# Altium PCB PCB1.PcbDoc (part 1 of 3)
Units mil, origin at the board's own origin, x right, y up, seen from the top; angles counter-clockwise.
Board outline 3937.01 x 3937.01 mil, 4 copper layers (L1, L2, L3, L4), stack 61.851 mil thick; 165 components, 197 nets, 827 pads, 400 vias.
Unrouted connection lines stored in the file: 1.
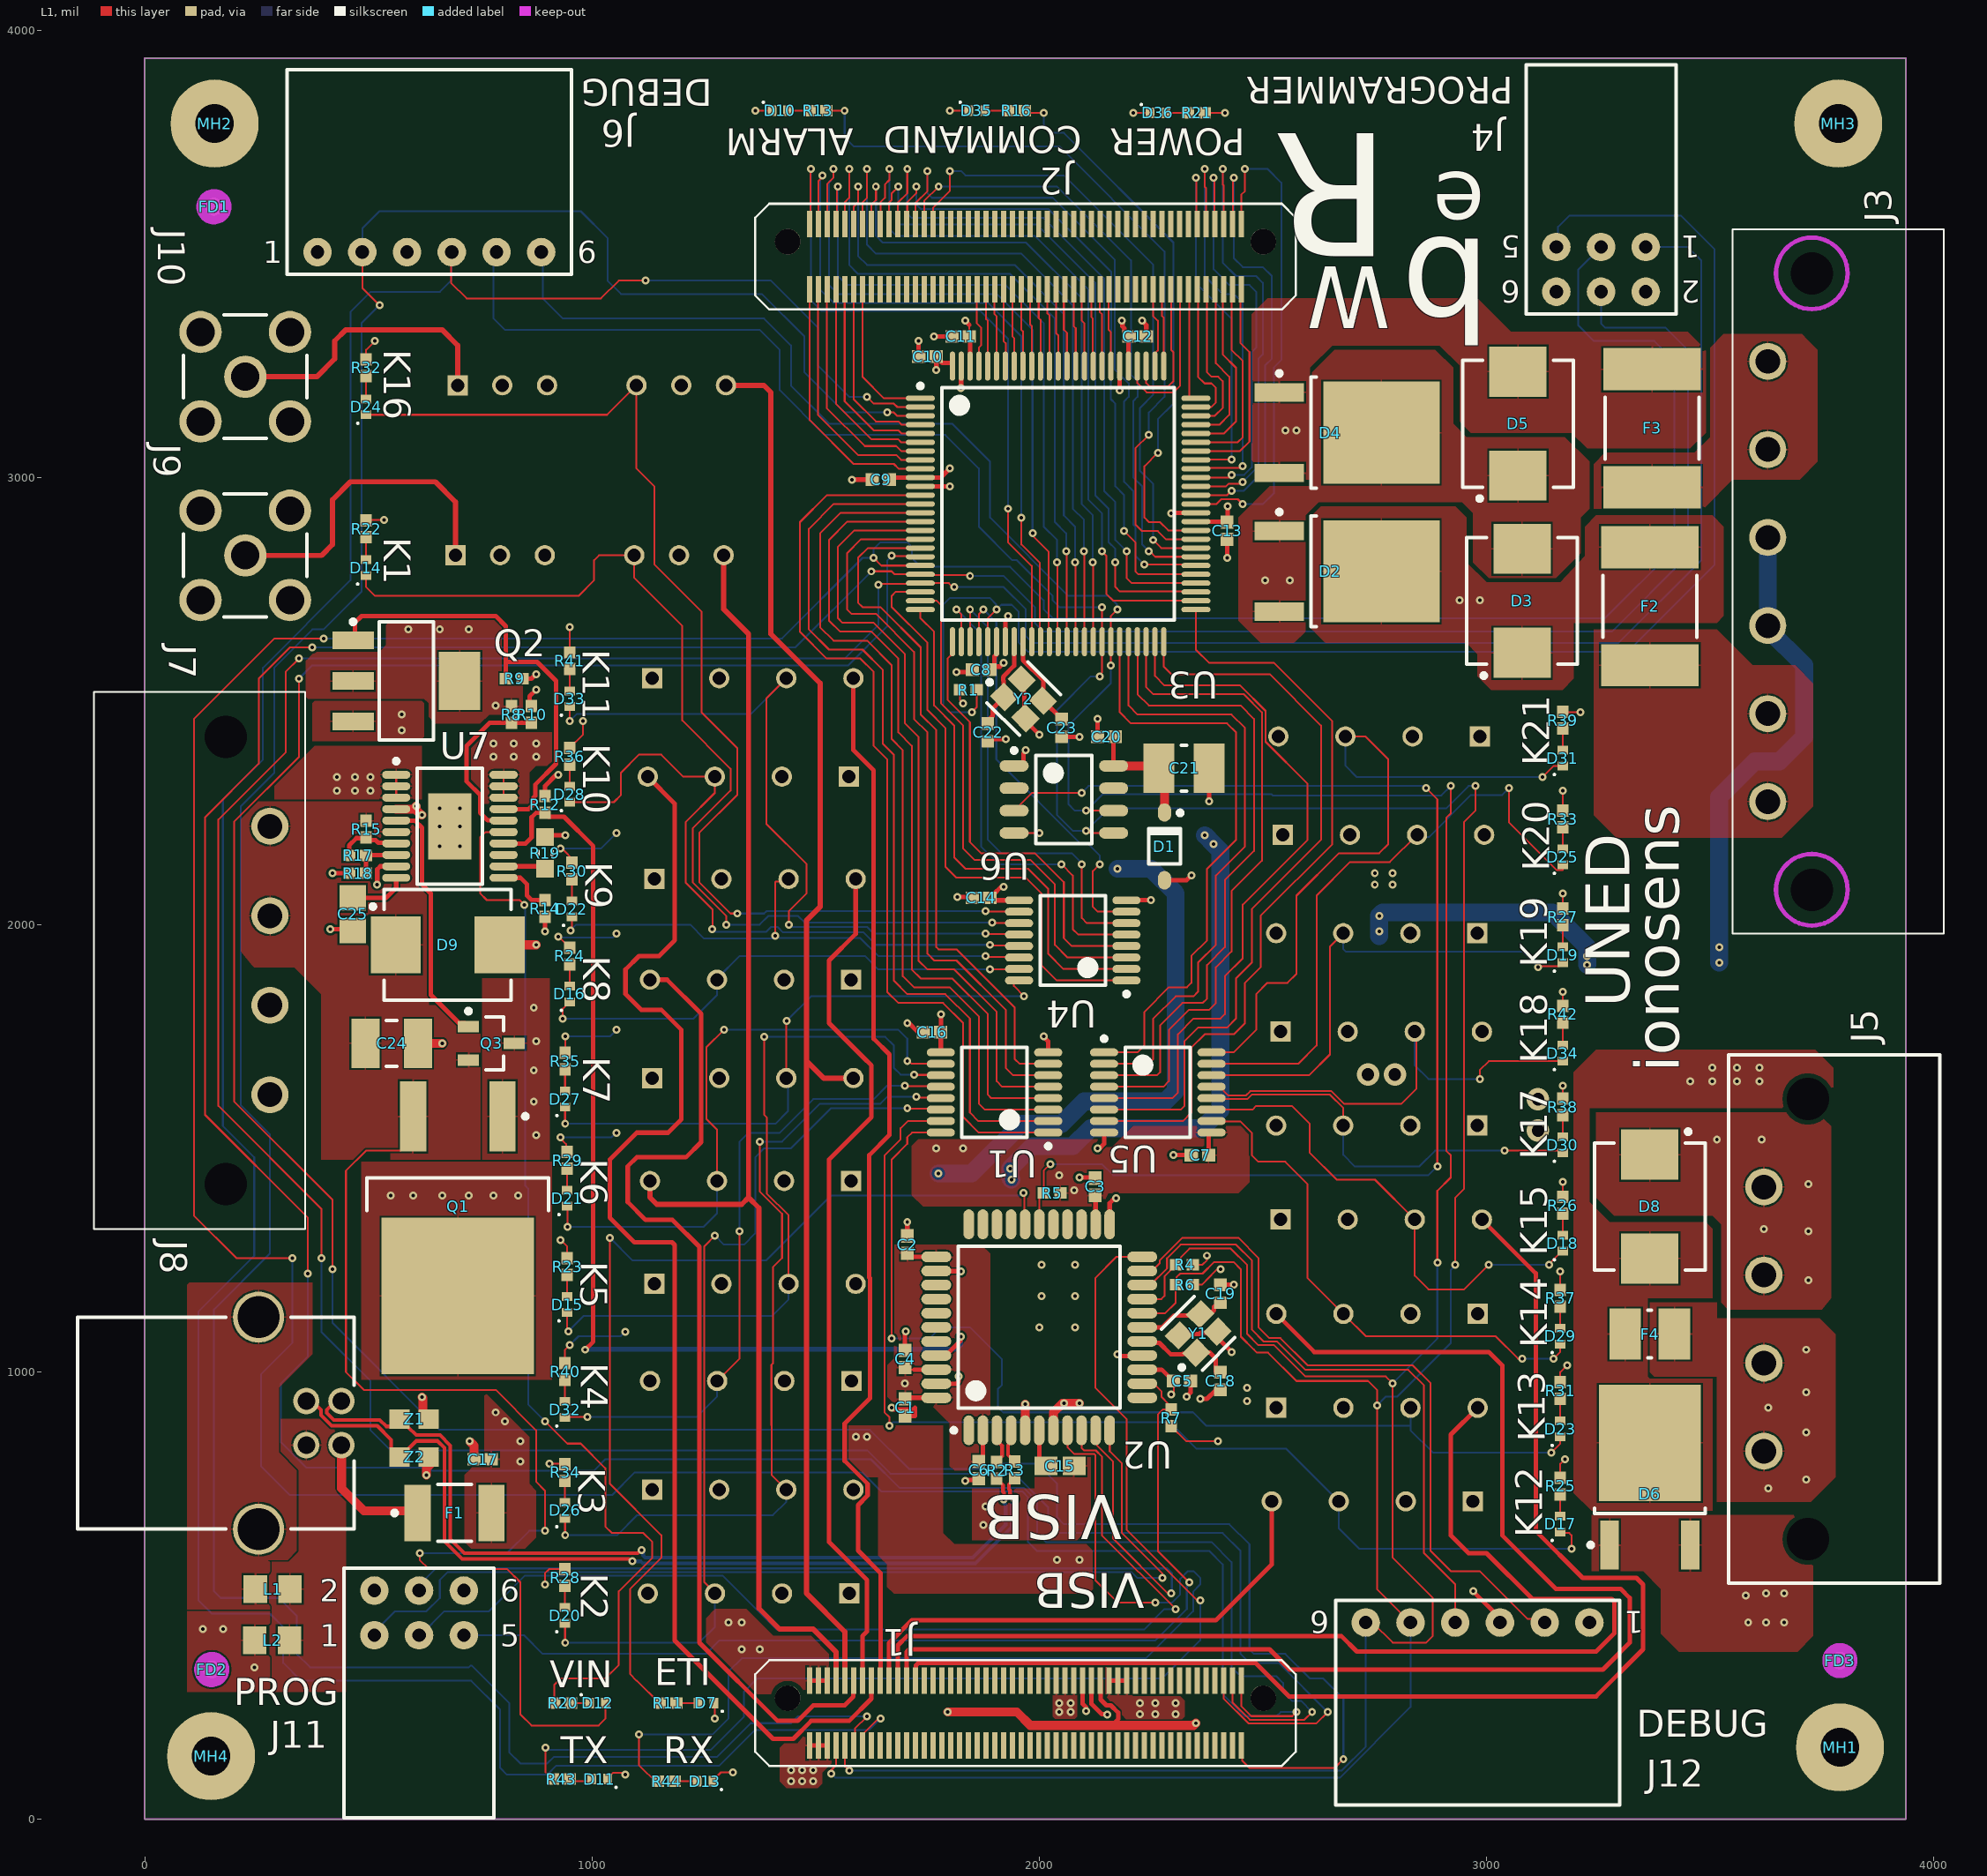
[diagram p0: L1 view]
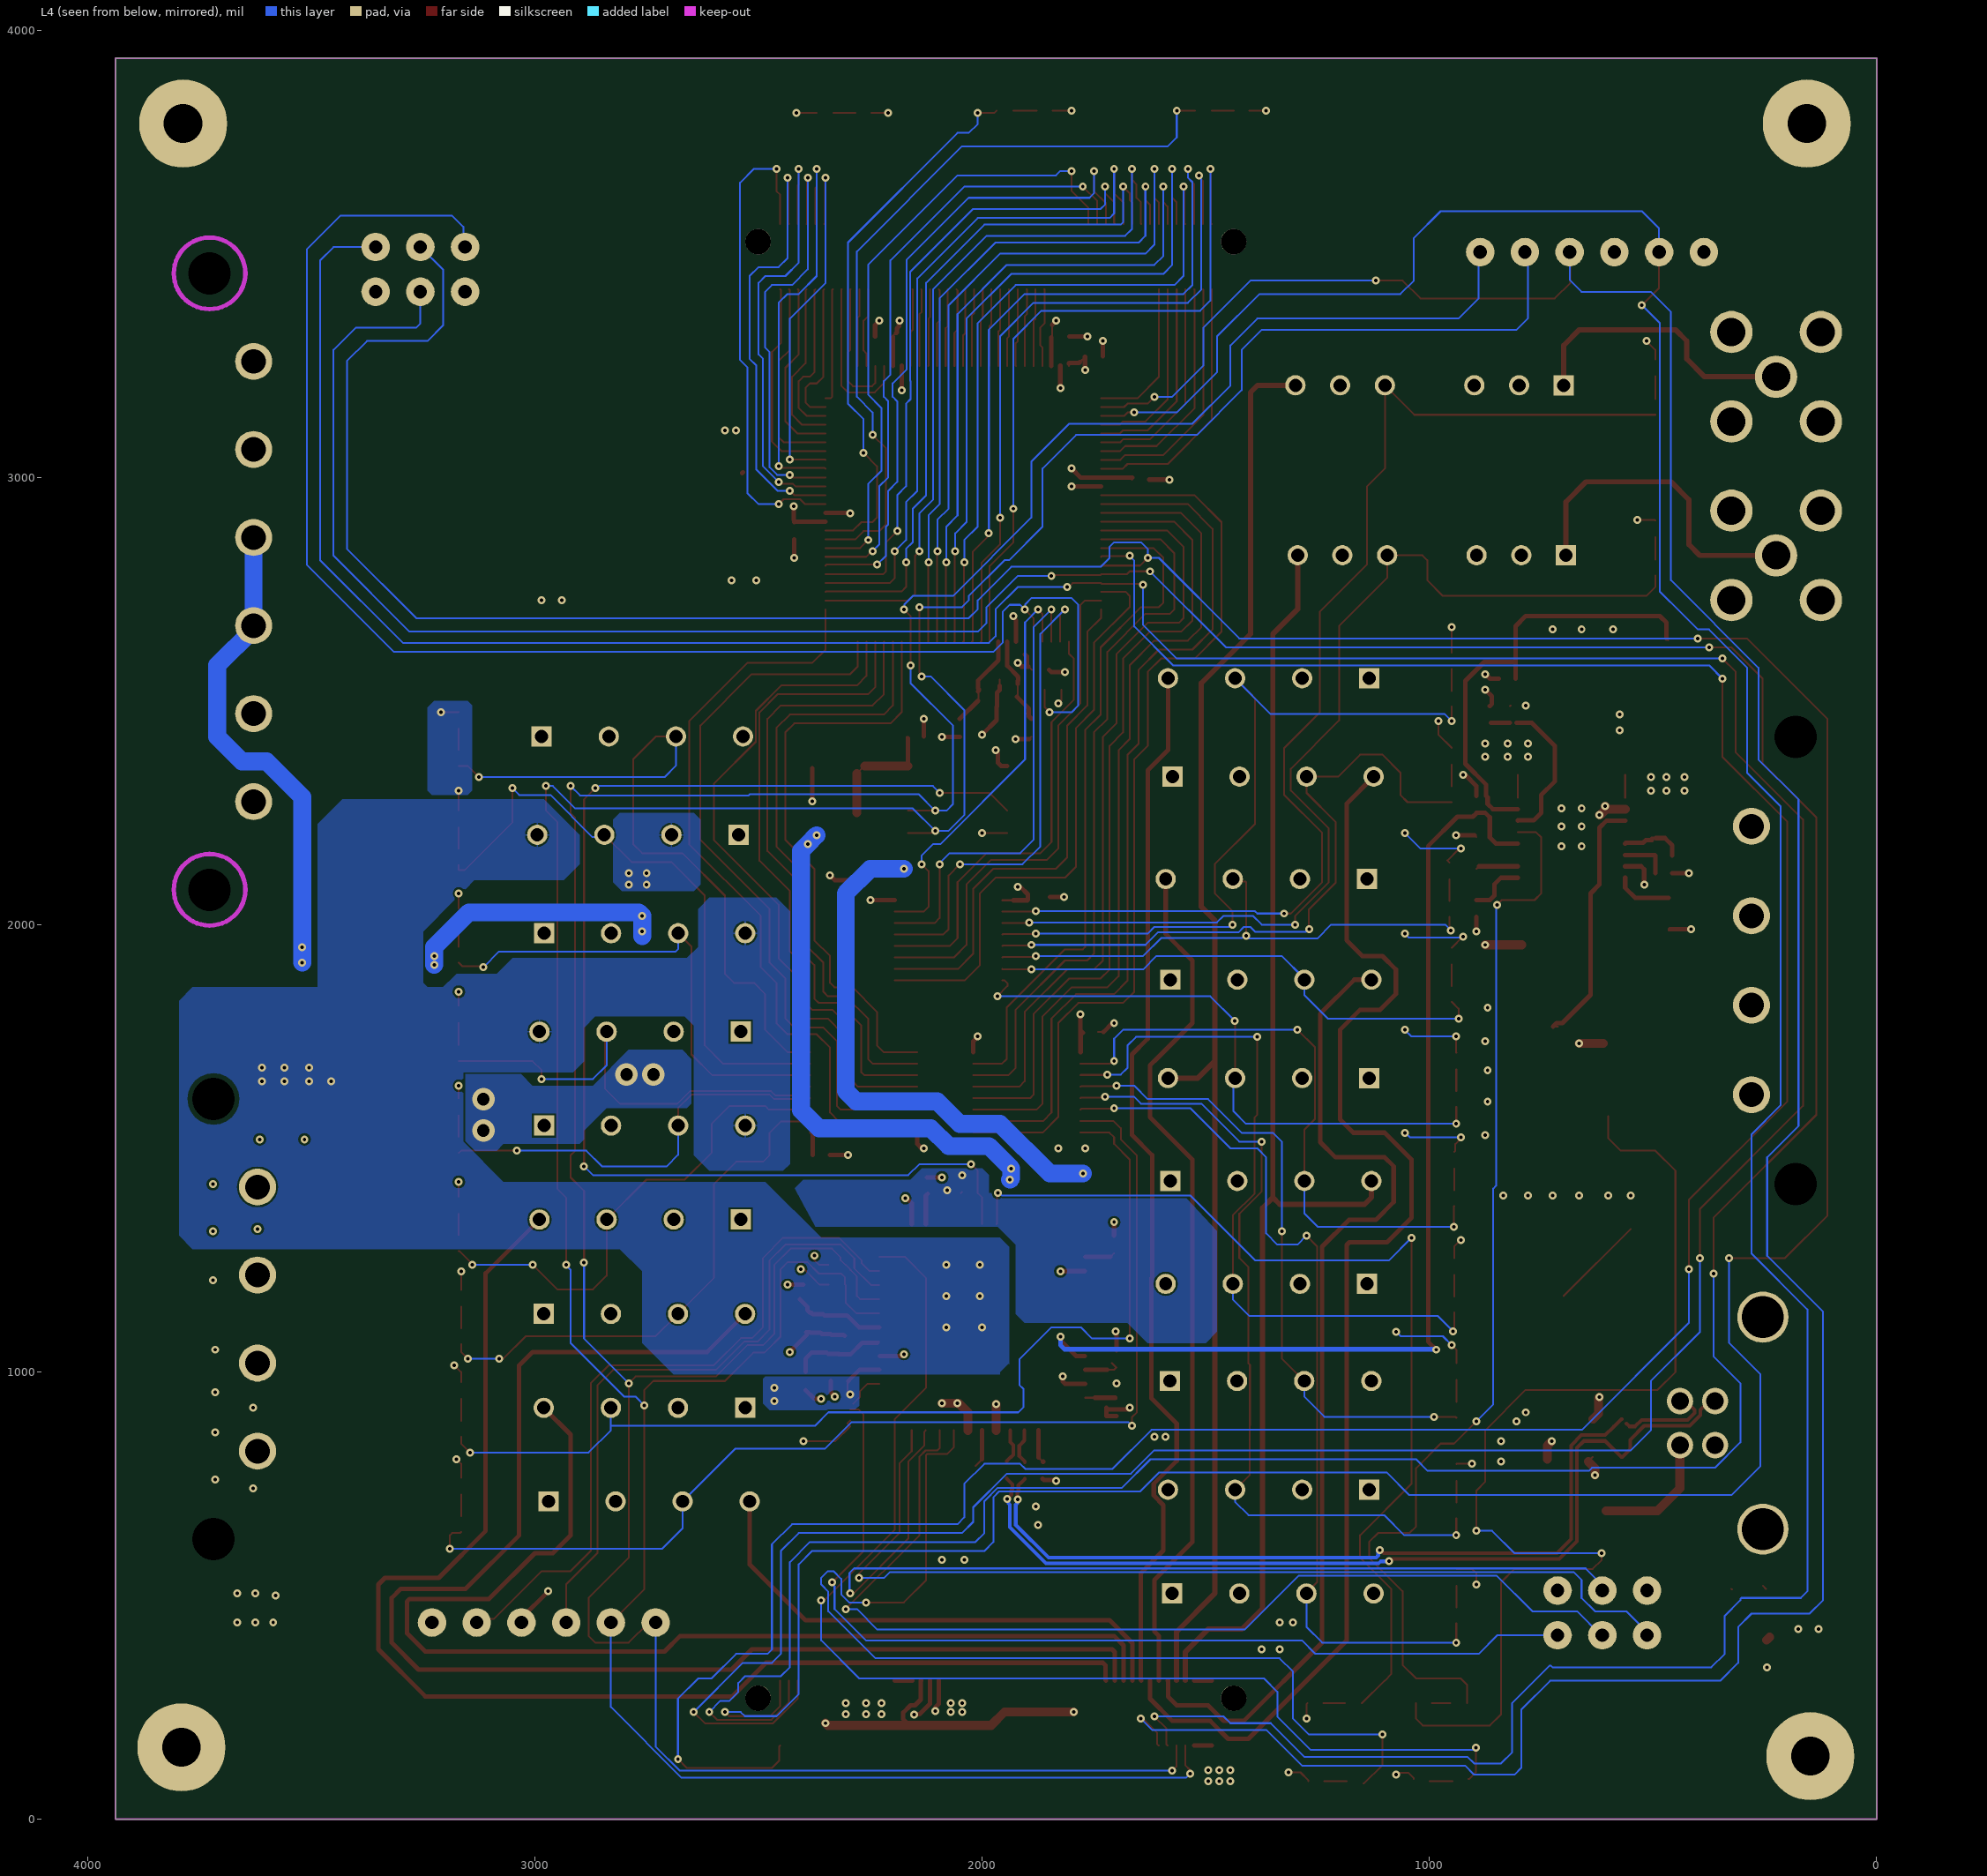
[diagram p1: L4 view, seen from below]
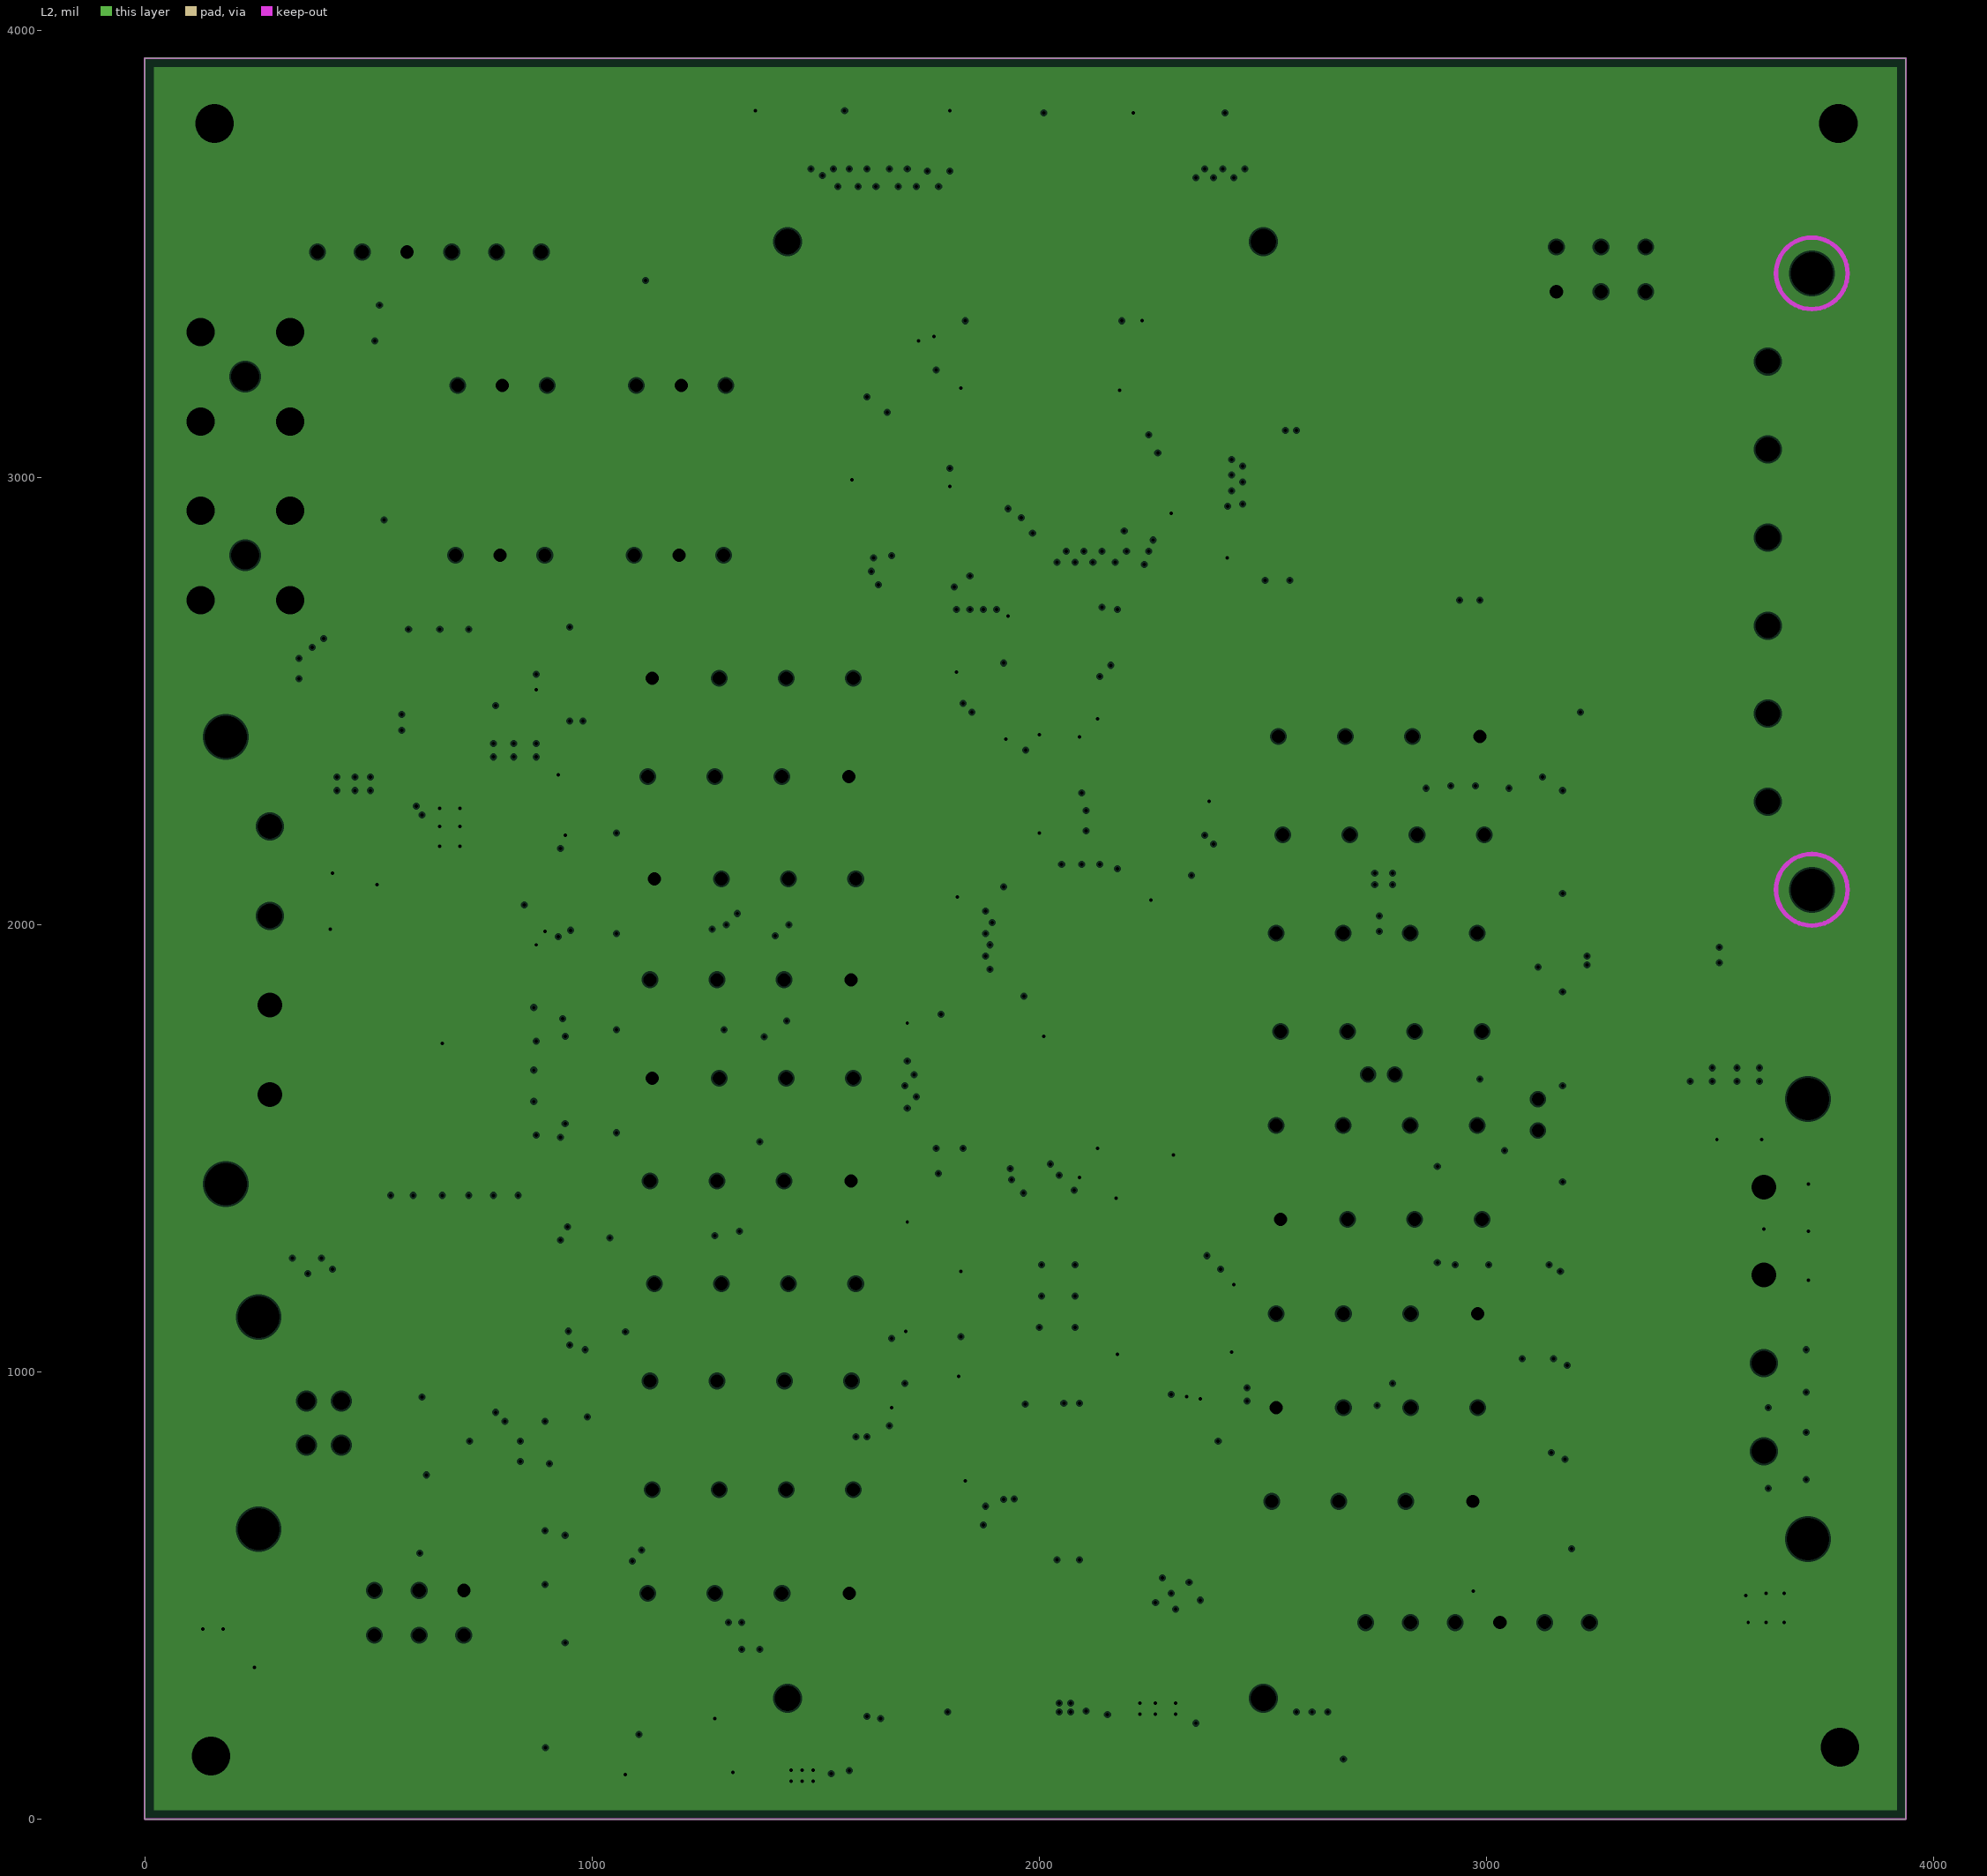
[diagram p2: L2, clearances drawn from the general rule]
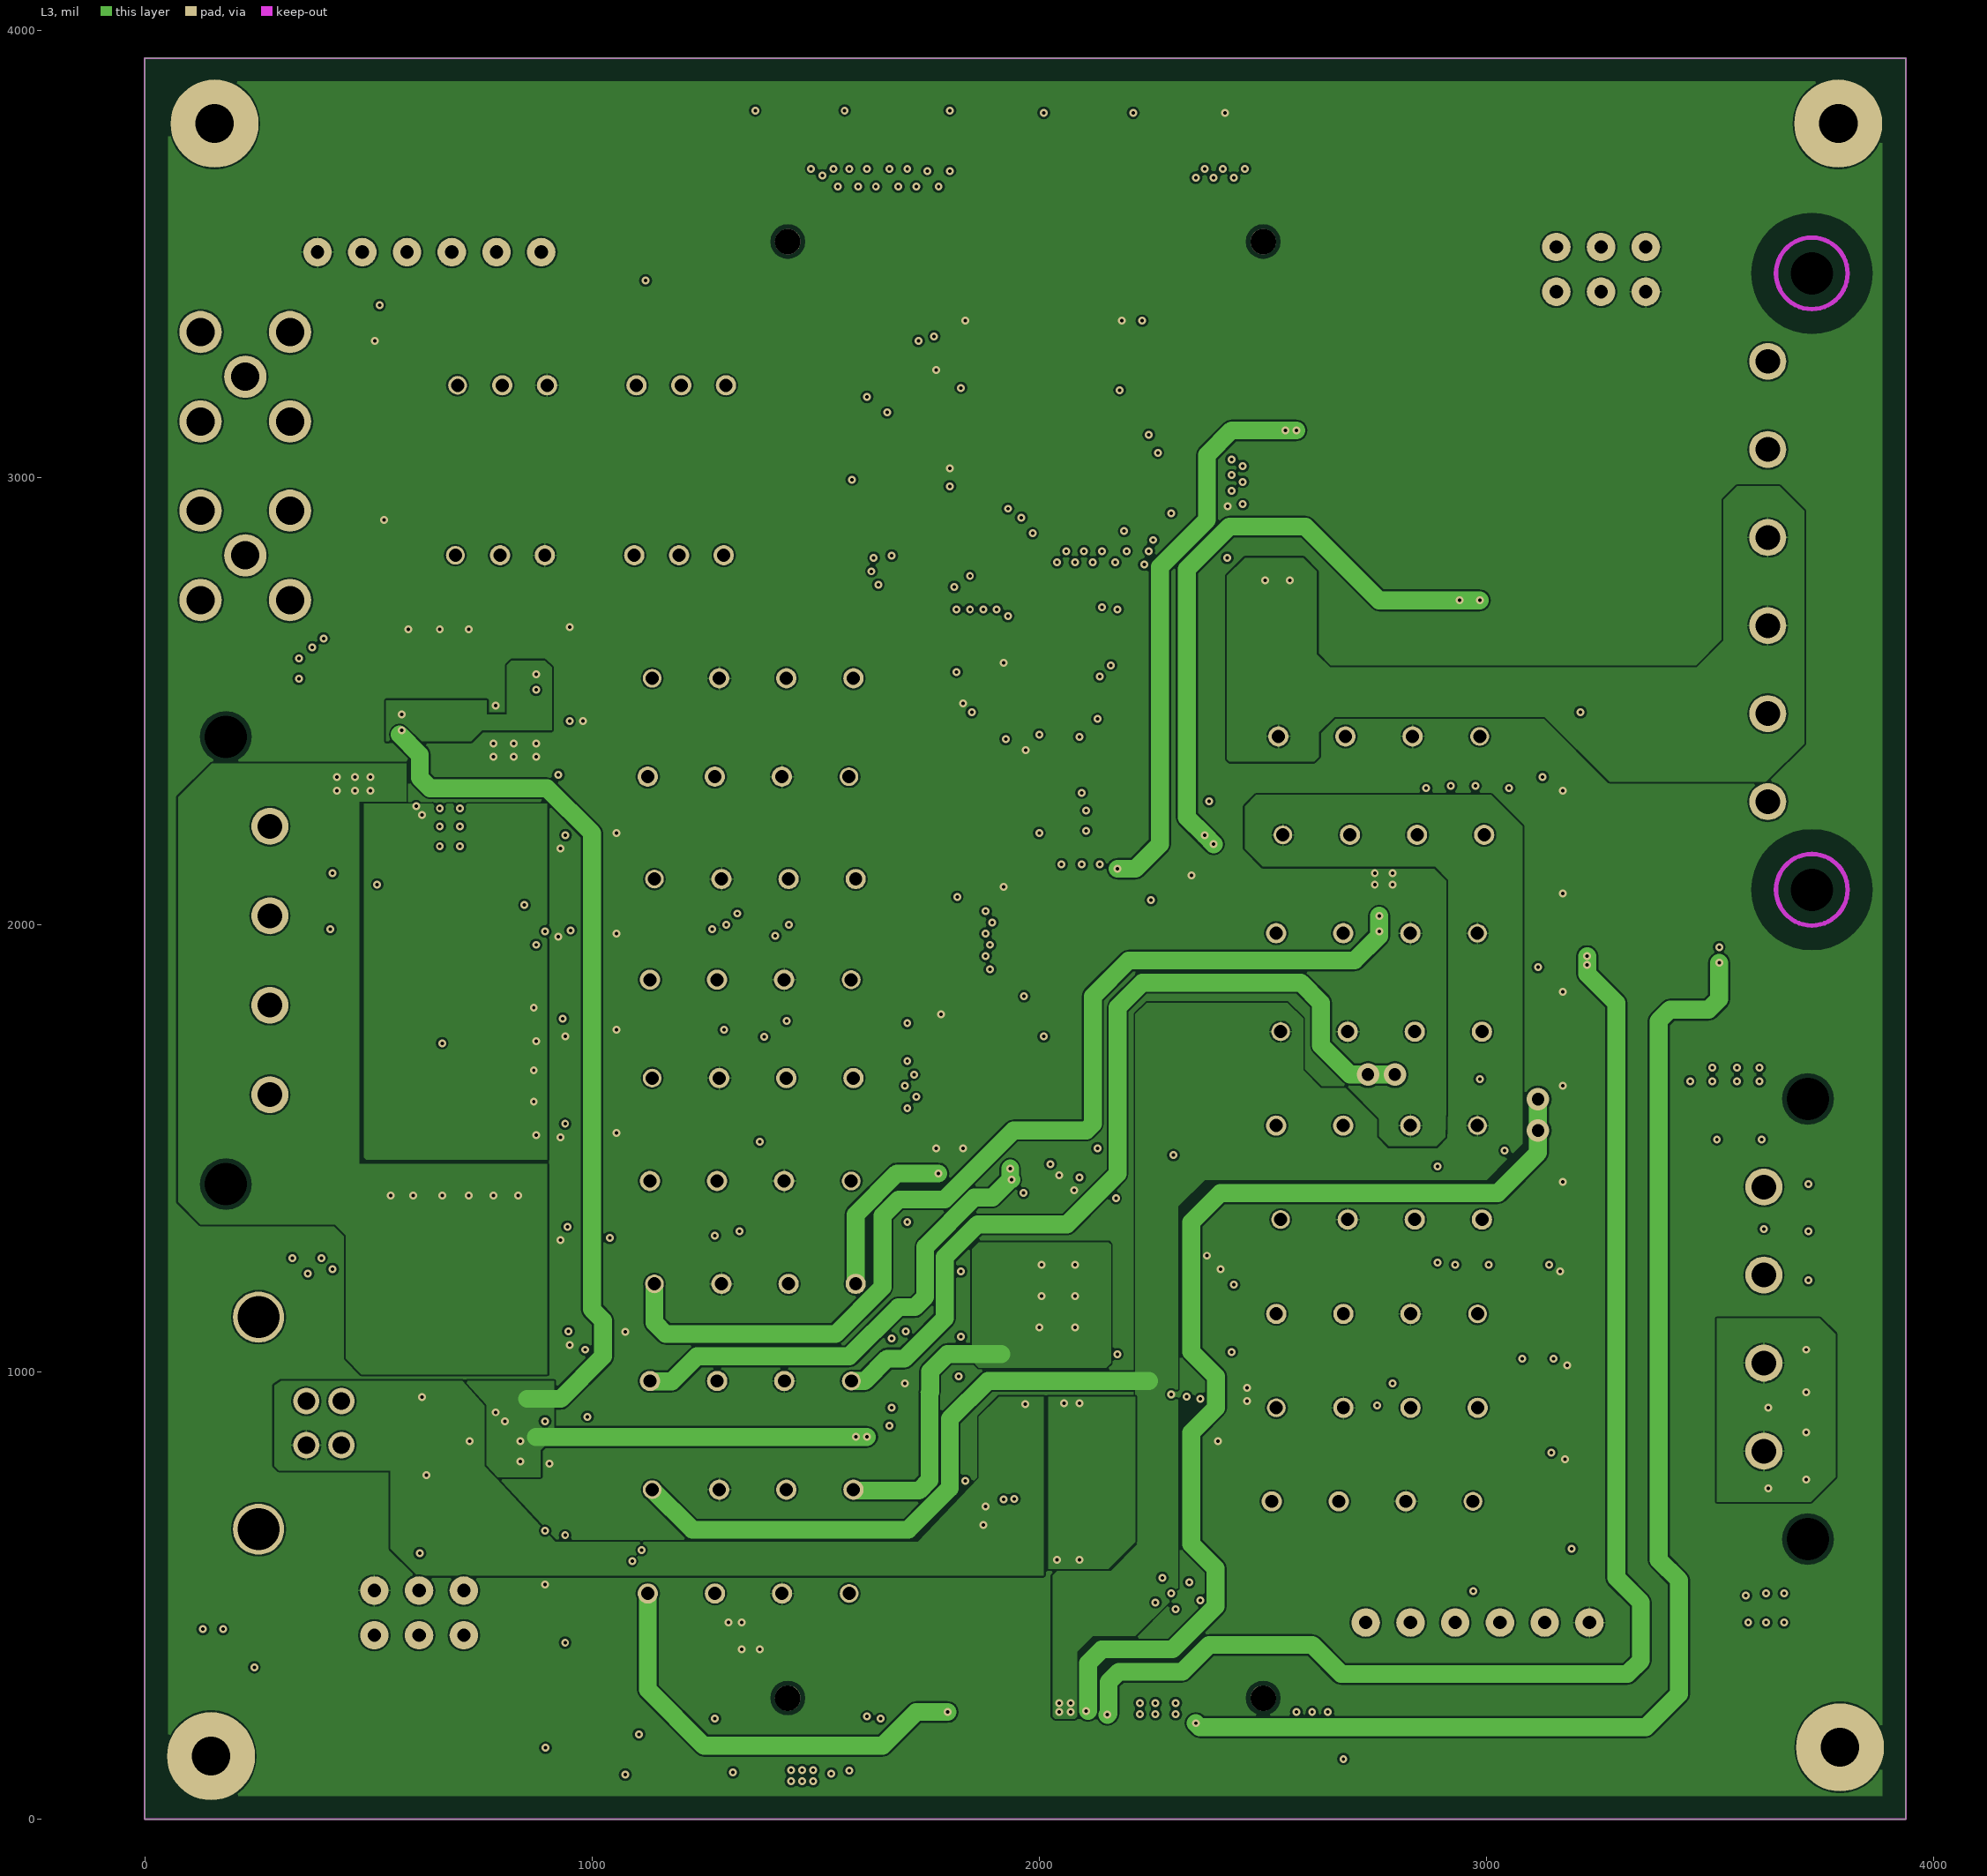
[diagram p3: L3]
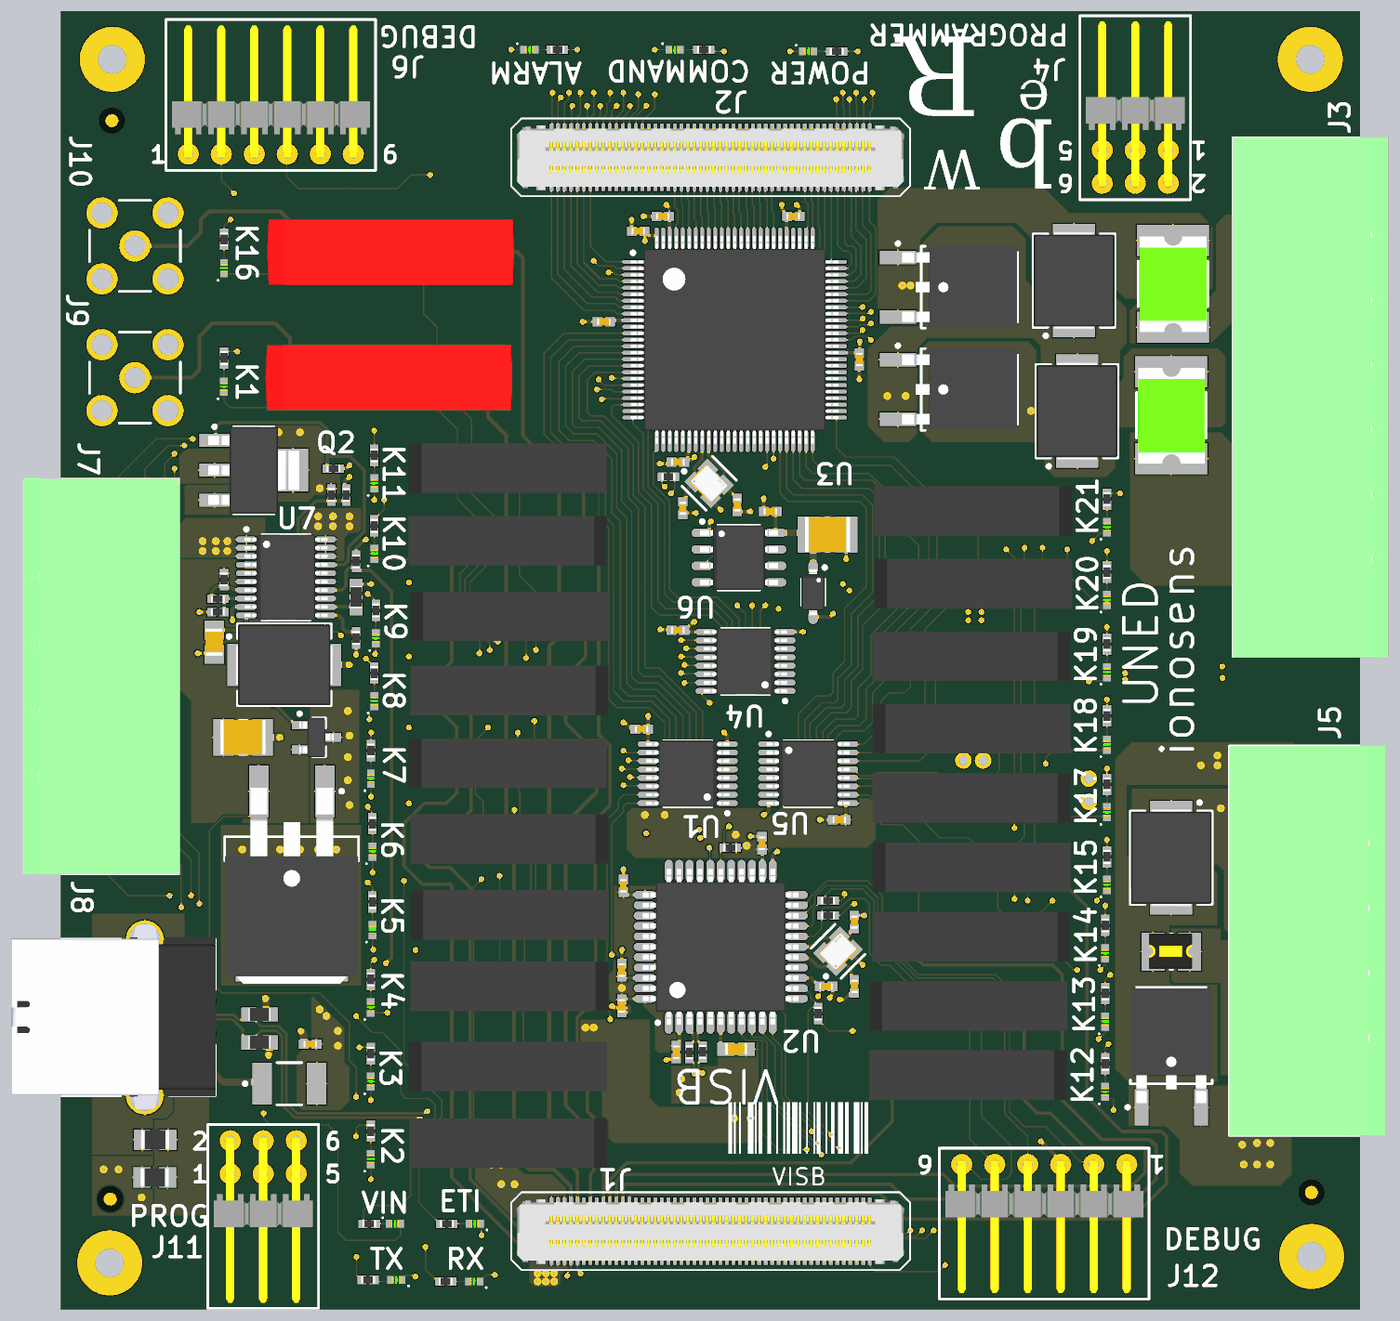
[diagram p6: 3D render of the assembled board from above, using the file's embedded part models]

## Layer stack, top to bottom
Top Mask: solder mask 0.5906, Solder Resist, Dk 3.8
L1: signal copper 1.378
Dielectric 1: prepreg 7.874, 7628, Dk 4.6
L2: plane copper 0.709, net GND
Core: core 41.9291, FR-4, Dk 4.5
L3: signal copper 0.709
Dielectric 2: prepreg 7.874, 7628, Dk 4.6
L4: signal copper 1.378
Bottom Mask: solder mask 0.5906, Solder Resist, Dk 3.8

## Board outline
0.25,0.25 3937.26,0.25 3937.26,3937.26 0.25,3937.26

## Design rules (kind name [scope] priority, off if disabled: settings)
BoardOutlineClearance [All] p1: gap=7.87 ignorepadtopadclearanceinfootprint=FALSE
Clearance Clearance_Keepout [OnLayer('Keep-Out Layer')] p1: gap=50 ignorepadtopadclearanceinfootprint=FALSE except(9.84: Arc-Hole Track-Hole SMDPad-Hole THPad-Hole Via-Hole Fill-Hole Poly-Hole Region-Hole Text-Hole; 25: Arc-THPad Track-THPad SMDPad-THPad THPad-THPad THPad-Via THPad-Fill THPad-Poly THPad-Region THPad-Text; 100: SMDPad-SMDPad)
Clearance [All] p2: gap=4 ignorepadtopadclearanceinfootprint=FALSE except(5: Arc-Via Track-Via SMDPad-Via THPad-Via Via-Via Via-Fill Via-Poly Via-Region Via-Text; 9.84: Arc-Hole Track-Hole SMDPad-Hole THPad-Hole Via-Hole Fill-Hole Poly-Hole Region-Hole Text-Hole)
ComponentClearance [All] p1: gap=4 collisioncheckmode=3 verticalgap=4 showdistances=TRUE
DiffPairsRouting [InDifferentialPair('DATA')] p1: maxlimit=10 minlimit=5 mostfreqgap=10 toplayer_maxgap=5 toplayer_prefgap=5 toplayer_minwidth=8.1 toplayer_maxwidth=8.1 toplayer_prefwidth=8.1 bottomlayer_maxgap=5 bottomlayer_prefgap=5 bottomlayer_minwidth=8.1 bottomlayer_maxwidth=8.1 bottomlayer_prefwidth=8.1 impedanceprofiledriven=TRUE impedanceprofileid={4C6E645C-3FE2-49AF-B8F4-F8B945DF8264} impedanceprofilevalue=90.000000 maxuncoupledlength=500
DiffPairsRouting DiffPairsRouting_1 [InDifferentialPair('D')] p2: maxlimit=10 minlimit=5 mostfreqgap=10 toplayer_maxgap=5 toplayer_prefgap=5 toplayer_minwidth=8.1 toplayer_maxwidth=8.1 toplayer_prefwidth=8.1 bottomlayer_maxgap=5 bottomlayer_prefgap=5 bottomlayer_minwidth=8.1 bottomlayer_maxwidth=8.1 bottomlayer_prefwidth=8.1 impedanceprofiledriven=TRUE impedanceprofileid={4C6E645C-3FE2-49AF-B8F4-F8B945DF8264} impedanceprofilevalue=90.000000 maxuncoupledlength=500
Height [All] p1: minheight=0 maxheight=71497.94 prefheight=500
HoleSize [All] p1: absolutevalues=TRUE maxlimit=248.03 minlimit=7.87 maxpercent=80.000 minpercent=20.000
HoleToHoleClearance [All] p1: gap=9.84 allowstackedmicrovias=FALSE
MatchedLengths [All] p1: tolerance=100 checknetsindiffpair=TRUE checkdiffpairvsdiffpair=FALSE checkxsignals=FALSE checkothers=FALSE
MinimumAnnularRing [All] p1: minimumring=3
MinimumSolderMaskSliver [All] p1: minsoldermaskwidth=0
PlaneClearance [All] p1: clearance=4
PlaneConnect PlaneConnectPowerPads [InPadClass('PowerPads')] p1: planeconnectstyle=Direct reliefexpansion=20 reliefentries=4 reliefconductorwidth=10 reliefairgap=10
PlaneConnect [All] p2: pad.planeconnectstyle=Relief pad.reliefexpansion=11.81 pad.reliefentries=4 pad.reliefconductorwidth=4 pad.reliefairgap=4 via.planeconnectstyle=Direct via.reliefexpansion=11.81 via.reliefentries=4 via.reliefconductorwidth=5 via.reliefairgap=5
PolygonConnect PolygonConnectPowerPads [All vs (InPadClass('PowerPads'))] p1: connectstyle=Direct reliefconductorwidth=10 reliefentries=4 polygonreliefangle="90 Angle" airgapwidth=10
PolygonConnect [All] p2: thpad.connectstyle=Relief thpad.reliefconductorwidth=4 thpad.reliefentries=4 thpad.polygonreliefangle="90 Angle" thpad.airgapwidth=4 smdpad.connectstyle=Relief smdpad.reliefconductorwidth=4 smdpad.reliefentries=4 smdpad.polygonreliefangle="90 Angle" smdpad.airgapwidth=4 via.connectstyle=Direct via.reliefconductorwidth=5 via.reliefentries=4 via.polygonreliefangle="90 Angle" via.airgapwidth=5
RoutingVias [All] p1: holewidth=7.87 width=17.72 viastyle="Through Hole" minholewidth=7.87 minwidth=17.72 maxholewidth=248.03 maxwidth=257.87
SilkToSilkClearance [All] p1: silktosilkclearance=0
SilkToSolderMaskClearance [IsPad] p1: minsilkscreentomaskgap=4 clearancetoexposedcopper=TRUE
SolderMaskExpansion [All] p1: expansion=2.95 istentingtop=FALSE
Width Width_50ohm [InNetClass('Relays_I/O')] p1: maxlimit=11.55 minlimit=10 preferedwidth=11.55 toplayer_minwidth=11.55 bottomlayer_minwidth=11.55 impedanceprofiledriven=TRUE impedanceprofileid={86A6CEE6-3E9C-4486-8856-E31ACB37DFB8} impedanceprofilevalue=50.000000 minimp=50.000000 maximp=50.000000 favimp=50.000000
Width Width_Nodes [InNetClass('Nodes')] p2: maxlimit=12 minlimit=10 preferedwidth=11.55 midlayer2_maxwidth=10 midlayer2_prefwidth=10 minimp=50.000000 maximp=50.000000 favimp=50.000000
Width [All] p3: maxlimit=71497.94 minlimit=4 preferedwidth=4
20 further rules are at their usual default settings.

## Classes and differential pairs
net class Nodes: A B C D E F G H I J
net class Relays_I/O: A B FGEN FGEN1
component class Sheet3: FD1 FD2 FD3 J1 J2 J3 J4 J5 J6 J7 J8 J9 J10 J11 J12 MH1 MH2 MH3 MH4
component class Sheet2: D14 D15 D16 D17 D18 D19 D20 D21 D22 D23 D24 D25 D26 D27 D28 D29 D30 D31 D32 D33 D34 K1 K2 K3 K4 K5 K6 K7 K8 K9 K10 K11 K12 K13 K14 K15 K16 K17 K18 K19 K20 K21 R22 R23 R24 R25 R26 R27 R28 R29 R30 R31 R32 R33 R34 R35 R36 R37 R38 R39 R40 R41 R42
component class Sheet1: C1 C2 C3 C4 C5 C6 C7 C8 C9 C10 C11 C12 C13 C14 C15 C16 C17 C18 C19 C20 C21 C22 C23 C24 C25 D1 D2 D3 D4 D5 D6 D7 D8 D9 D10 D11 D12 D13 D35 D36 F1 F2 F3 F4 L1 L2 Q1 Q2 Q3 R1 R2 R3 R4 R5 R6 R7 R8 R9 R10 R11 R12 R13 R14 R15 R16 R17 R18 R19 R20 R21 R43 R44 U1 U2 U3 U4 U5 U6 U7 Y1 Y2 Z1 Z2
differential pair D: +D_P -D_N
differential pair DATA: +DATA_P -DATA_N

## Components (designator, comment, footprint, x,y, rotation, side; value= is the part's Value field where it differs from the comment)
C1 "CC0402JRX7R7BB104" CAPC1005X06M#1 1700,920.71 r90 top value=100nF
C2 "CC0402JRX7R7BB104" CAPC1005X06M#1 1705,1285 r270 top value=100nF
C3 "CC0402JRX7R7BB104" CAPC1005X06M#1 2125,1414.29 r270 top value=100nF
C4 "CC0402JRX7R7BB104" CAPC1005X06M#1 1700,1029.29 r270 top value=100nF
C5 "CC0402JRX7R7BB104" CAPC1005X06M#1 2319.29,980 r180 top value=100nF
C6 "CC0402JRX7R7BB104" CAPC1005X06M#1 1865,780.71 r90 top value=100nF
C7 "CC0402JRX7R7BB104" CAPC1005X06M#1 2359.29,1485 r0 top value=100nF
C8 "CC0402JRX7R7BB104" CAPC1005X06M#1 1870,2570 r0 top value=100nF
C9 "CC0402JRX7R7BB104" CAPC1005X06M#1 1645.71,2995 r0 top value=100nF
C10 "CC0402JRX7R7BB104" CAPC1005X06M#1 1750,3270 r0 top value=100nF
C11 "CC0402JRX7R7BB104" CAPC1005X06M#1 1824.29,3315 r0 top value=100nF
C12 "CC0402JRX7R7BB104" CAPC1005X06M#1 2220,3315 r180 top value=100nF
C13 "CC0402JRX7R7BB104" CAPC1005X06M#1 2420,2880.71 r90 top value=100nF
C14 "CC0402JRX7R7BB104" CAPC1005X06M#1 1870,2060 r0 top value=100nF
C15 "CC0603JRX7R7BB105" CAPC1608X09M 2046.5,790 r180 top value=1µF
C16 "CC0402JRX7R7BB104" CAPC1005X06M#1 1760,1760 r0 top value=100nF
C17 "CC0402JRX7R7BB104" CAPC1005X06M#1 755.71,805 r0 top value=100nF
C18 "CC0402JRNPO9BN200" CAPC1005X06M#2 2405,980 r90 top value=20pF
C19 "CC0402JRNPO9BN200" CAPC1005X06M#2 2405,1175 r270 top value=20pF
C20 "CC0402JRX7R7BB104" CAPC1005X06M#1 2150,2420 r0 top value=100nF
C21 "EMK325ABJ107MM-P" CAPC3225X27M 2323.9,2350 r180 top value=100µF
C22 "CC0402JRNPO9BN200" CAPC1005X06M#2 1885,2430 r90 top value=20pF
C23 "CC0402JRNPO9BN200" CAPC1005X06M#2 2050,2440 r90 top value=20pF
C24 "CC1210KKX7R0BB105" CAPC3225X22M 552.52,1735 r180 top value=1µF
C25 "CC0805JRX7R9BB273" CAPC2012X14M 465,2023.58 r90 top value=27nF
D1 "MBR130T1G" TSSOP0P360X135-2M 2280,2175 r90 top
D2 "V20PW10-M3/I" DPAK229P900X140-3M 2688.23,2790 r0 top
D3 "SMCJ36CA" DIOM6959X26M 3079.4,2724.16 r90 top
D4 "V20PW10-M3/I" DPAK229P900X140-3M 2688.23,3100 r0 top
D5 "SMCJ36CA" DIOM6959X26M 3070.29,3120 r90 top
D6 "V20PW10-M3/I" DPAK229P900X140-3M 3365.23,764.87 r90 top
D7 "SML-P12UTT86R" DIOC1005X02R 1255,260 r180 top
D8 "SMCJ7.0CA" DIOM6959X26M 3365,1370 r270 top
D9 "SMCJ36CA" DIOM6959X26M 677.52,1955 r0 top
D10 "SML-P12UTT86R" DIOC1005X02R 1420,3820 r0 top
D11 "SML-P13PTT86R" DIOC1005X02R 1017.38,90 r180 top
D12 "SML-P12UTT86R" DIOC1005X02R 1012.62,260 r0 top
D13 "SML-P13PTT86R" DIOC1005X02R 1252.82,85 r180 top
D14 "SML-P13PTT86R" DIOC1005X02R 494.66,2798.06 r90 top
D15 "SML-P13PTT86R" DIOC1005X02R 944.66,1150.88 r90 top
D16 "SML-P13PTT86R" DIOC1005X02R 950,1845 r90 top
D17 "SML-P13PTT86R" DIOC1005X02R 3165,660.09 r90 top
D18 "SML-P13PTT86R" DIOC1005X02R 3170,1287.62 r90 top
D19 "SML-P13PTT86R" DIOC1005X02R 3170,1932.62 r90 top
D20 "SML-P13PTT86R" DIOC1005X02R 939.66,455.88 r90 top
D21 "SML-P13PTT86R" DIOC1005X02R 944.66,1388.49 r90 top
D22 "SML-P13PTT86R" DIOC1005X02R 955,2035 r90 top
D23 "SML-P13PTT86R" DIOC1005X02R 3165,872.62 r90 top
D24 "SML-P13PTT86R" DIOC1005X02R 495,3157.62 r90 top
D25 "SML-P13PTT86R" DIOC1005X02R 3170,2151.39 r90 top
D26 "SML-P13PTT86R" DIOC1005X02R 939.66,690.88 r90 top
D27 "SML-P13PTT86R" DIOC1005X02R 940,1610 r90 top
D28 "SML-P13PTT86R" DIOC1005X02R 950,2291.49 r90 top
D29 "SML-P13PTT86R" DIOC1005X02R 3165,1080 r90 top
D30 "SML-P13PTT86R" DIOC1005X02R 3170,1507.62 r90 top
D31 "SML-P13PTT86R" DIOC1005X02R 3170,2372.18 r90 top
D32 "SML-P13PTT86R" DIOC1005X02R 939.66,915.88 r90 top
D33 "SML-P13PTT86R" DIOC1005X02R 950,2505 r90 top
D34 "SML-P13PTT86R" DIOC1005X02R 3170,1712.62 r90 top
D35 "SML-P13PTT86R" DIOC1005X02R 1860,3820 r0 top
D36 "SML-P13PTT86R" DIOC1005X02R 2265,3815 r0 top
F1 "MF-MSMF050-2" BOUR-MF-MSMF050-2_V 692.68,685 r0 top
F2 "0ZCF0110FF2C" RESC7451X09M 3365,2711.89 r90 top
F3 "0ZCF0110FF2C" RESC7451X09M 3370,3110 r90 top
F4 "MF-USML550/12-2" RESC3226X12M 3365.12,1085 r180 top
FD1 "FID1X2R" FID1X2R 155,3605 r0 top
FD2 "FID1X2R" FID1X2R 150,335 r90 top
FD3 "FID1X2R" FID1X2R 3790,355 r90 top
J1 "LSHM-150-06.0-L-DV-A-N-K-TR" LSHM_150_06_0_L_DV_A_N_K_TR 1969.25,237.68 r180 top
J2 "LSHM-150-06.0-L-DV-A-N-K-TR" LSHM_150_06_0_L_DV_A_N_K_TR 1969.25,3493.58 r180 top
J3 "1776731" 1776731 3550,2767.13 r90 top
J4 "TSW-103-08-F-D-RA" TSW-103-08-F-D-RA 3255.97,3625 r180 top
J5 "1776715" 1776715 3500,1118.15 r90 top
J6 "HTSW-106-08-F-S-RA" TSW-106-08-F-S-RA 636.57,3613.66 r0 top
J7 "1776524" 1776537 400.04,1920 r270 top
J8 "2923041" 292304-1 400.71,885.79 r270 top
J9 "SMA-J-P-H-RA-TH1" SMA-J-P-H-RA-TH1 225,2825.64 r0 top
J10 "SMA-J-P-H-RA-TH1" SMA-J-P-H-RA-TH1 225,3225 r0 top
J11 "TSW-103-08-F-D-RA" TSW-103-08-F-D-RA 613.51,301.65 r0 top
J12 "HTSW-106-08-F-S-RA" TSW-106-08-F-S-RA 2980,330 r180 top
K1 "9002-05-00" "SIP564W40P254L1980H810Q6 - Cloned" 994.66,2825.88 r0 top
K2 "3570.1419.051" 3570.1419 1350,505 r180 top
K3 "3570.1419.051" 3570.1419 1359.66,737.1 r0 top
K4 "3570.1419.051" 3570.1419 1355,980 r180 top
K5 "3570.1419.051" 3570.1419 1364.66,1197.1 r0 top
K6 "3570.1419.051" 3570.1419 1354.66,1427.1 r180 top
K7 "3570.1419.051" 3570.1419 1359.66,1657.1 r0 top
K8 "3570.1419.051" 3570.1419 1354.66,1877.1 r180 top
K9 "3570.1419.051" 3570.1419 1364.66,2102.1 r0 top
K10 "3570.1419.051" 3570.1419 1349.66,2330.88 r180 top
K11 "3570.1419.051" 3570.1419 1359.66,2550.88 r0 top
K12 "3570.1419.051" 3570.1419 2744.66,710.88 r180 top
K13 "3570.1419.051" 3570.1419 2755,920 r0 top
K14 "3570.1419.051" 3570.1419 2755,1130 r180 top
K15 "3570.1419.051" 3570.1419 2764.66,1340.88 r0 top
K16 "9002-05-00" "SIP564W40P254L1980H810Q6 - Cloned" 999.66,3205.88 r0 top
K17 "3570.1419.051" 3570.1419 2754.66,1550.88 r180 top
K18 "3570.1419.051" 3570.1419 2764.66,1760.88 r0 top
K19 "3570.1419.051" 3570.1419 2754.66,1980.88 r180 top
K20 "3570.1419.051" 3570.1419 2769.66,2200.88 r0 top
K21 "3570.1419.051" 3570.1419 2759.66,2420.88 r180 top
L1 "BLM21SP102SN1D" INDC2012X10M 286.22,515 r0 top
L2 "BLM21SP102SN1D" INDC2012X10M 285.01,400.66 r180 top
MH1 "C500h220" C500h220z368#1 3790,160 r0 top
MH2 "C500h220" C500h220z368#2 155,3790 r0 top
MH3 "C500h220" C500h220z368#3 3785,3790 r0 top
MH4 "C500h220" C500h220z368#4 150,140 r0 top
Q1 "CSD19535KTT" DPAK254P1510X470-3M 700,1323.54 r270 top
Q2 "NDT456P" SOT230P700X180-4M 585,2545 r0 top
Q3 "BSS138" SOT95P237X111-3M 775,1735 r0 top
R1 "AC0402FR-0710KL" RESC1005X04M 1841.3,2525 r180 top value=10k
R2 "AC0402FR-0722RL" RESC1005X04M 1905,780 r90 top value=22
R3 "AC0402FR-0722RL" RESC1005X04M 1945,781.3 r90 top value=22
R4 "AC0402FR-074K7L" RESC1005X04M 2325,1240 r0 top value=4.7k
R5 "AC0402FR-0710KL" RESC1005X04M 2028.7,1400 r0 top value=10k
R6 "AC0402FR-074K7L" RESC1005X04M 2325,1195 r0 top value=4.7k
R7 "AC0402FR-0710KL" RESC1005X04M 2295,897.4 r270 top value=10k
R8 "AC0402FR-07499KL" RESC1005X04M 820,2470 r90 top value=499k
R9 "AC0402FR-0710KL" RESC1005X04M 826.22,2550 r0 top value=10k
R10 "AC0402FR-07196KL" RESC1005X04M 865,2470 r270 top value=196k
R11 "AC0402FR-07240RL" RESC1005X04M 1170.09,260 r0 top value=240
R12 "AC0402FR-0716K2L" RESC1005X04M 895,2268.7 r90 top value=16.2k
R13 "AC0402FR-07240RL" RESC1005X04M 1505,3820 r180 top value=240
R14 "AC0402FR-072K94L" RESC1005X04M 895,2036.3 r270 top value=2.94k
R15 "AC0402FR-07332KL" RESC1005X04M 495,2213.7 r90 top value=332k
R16 "AC0402FR-07240RL" RESC1005X04M 1948.7,3820 r180 top value=240
R17 "AC0402FR-0722K6L" RESC1005X04M 476.3,2155 r180 top value=22.6k
R18 "AC0402FR-07100KL" RESC1005X04M 476.3,2115 r0 top value=100k
R19 "AC0603FR-070RL" RESC1608X06M#1 895,2160.43 r270 top value=0
R20 "AC0402FR-07240RL" RESC1005X04M 935,260 r0 top value=240
R21 "AC0402FR-07240RL" RESC1005X04M 2351.3,3815 r180 top value=240
R22 "AC0402FR-07240RL" RESC1005X04M 495,2885 r270 top value=240
R23 "AC0402FR-07240RL" RESC1005X04M 944.66,1235.79 r270 top value=240
R24 "AC0402FR-07240RL" RESC1005X04M 950,1929.91 r270 top value=240
R25 "AC0402FR-07240RL" RESC1005X04M 3165,745 r270 top value=240
R26 "AC0402FR-07240RL" RESC1005X04M 3170,1372.53 r270 top value=240
R27 "AC0402FR-07240RL" RESC1005X04M 3170,2017.53 r270 top value=240
R28 "AC0402FR-07240RL" RESC1005X04M 939.66,540.79 r270 top value=240
R29 "AC0402FR-07240RL" RESC1005X04M 944.66,1473.41 r270 top value=240
R30 "AC0402FR-07240RL" RESC1005X04M 955,2119.91 r270 top value=240
R31 "AC0402FR-07240RL" RESC1005X04M 3165,958.7 r270 top value=240
R32 "AC0402FR-07240RL" RESC1005X04M 495,3245 r270 top value=240
R33 "AC0402FR-07240RL" RESC1005X04M 3170,2236.3 r270 top value=240
R34 "AC0402FR-07240RL" RESC1005X04M 939.66,775.88 r270 top value=240
R35 "AC0402FR-07240RL" RESC1005X04M 940,1694.91 r270 top value=240
R36 "AC0402FR-07240RL" RESC1005X04M 950,2376.4 r270 top value=240
R37 "AC0402FR-07240RL" RESC1005X04M 3165,1164.91 r270 top value=240
R38 "AC0402FR-07240RL" RESC1005X04M 3170,1592.53 r270 top value=240
R39 "AC0402FR-07240RL" RESC1005X04M 3170,2457.1 r270 top value=240
R40 "AC0402FR-07240RL" RESC1005X04M 939.66,1000.79 r270 top value=240
R41 "AC0402FR-07240RL" RESC1005X04M 950,2589.91 r270 top value=240
R42 "AC0402FR-07240RL" RESC1005X04M 3170,1800 r270 top value=240
R43 "AC0402FR-07240RL" RESC1005X04M 931.3,90 r0 top value=240
R44 "AC0402FR-07240RL" RESC1005X04M 1166.3,85 r0 top value=240
U1 "ULN2003AIPWR" TSOP65P640X120-16M 1900,1625 r180 top
U2 "ATMEGA32U4-AU" TQFP80P1200X1200X120-44M 2000,1100 r90 top
U3 "ATMEGA2560-16AU" ATML-100A_M 2042.22,2940.63 r0 top
U4 "ULN2003AIPWR" TSOP65P640X120-16M 2075,1965 r180 top
U5 "ULN2003AIPWR" TSOP65P640X120-16M 2265,1625 r0 top
U6 "DS1682S+" SOIC127P600X175-8M 2055,2280 r0 top
U7 "TPS26631PWPR" TSOP65P640X120_HS-21M 682.52,2220 r0 top
Y1 "Q24FA20H0024700" FA-20H 2355.6,1086.22 r45 top
Y2 "Q24FA20H0024700" FA-20H 1965,2505 r315 top
Z1 "CG0603MLC-05E" RESC1608X06M#2 602.52,895 r0 top
Z2 "CG0603MLC-05E" RESC1608X06M#2 602.48,810 r0 top

## Footprints (in the part's own frame and the unit in brackets; to place one, negate y for a bottom-side part, rotate by r counter-clockwise, add the part's x,y. Pads: shape width x height; smd on the part's side, far side on the other; paste and mask are expansions set on the pad)
3570.1419 [mil] "Grade Mini SIP - 1 Form A"
  rect 45.28x45.28 / inner round 41.83 / far side rect 45.28x45.28 hole 29.53: 1(-225,0)
  round 45.28 hole 29.53: 2(-75,0) 3(75,0) 4(225,0)
  body extent -305,-75 295,75, height 255
292304-1 [mm] "Conn USB 2.0 Type B RCP 4 POS 2.5mm Solder RA Thru-Hole 4 Terminal 1 Port Box/Tray"
  round 1.5 hole 1: 1(1.25,1) 2(-1.25,1) 3(-1.25,-1) 4(1.25,-1)
  round 2.9 hole 2.38: 5(6.02,-3.71) 6(-6.02,-3.71)
  silkscreen extent -6.02,-13.99 6.02,1.72, body extent -7.23,-13.94 7.16,1.76, height 11
1776537 [mm] "Pluggable Terminal Blocks 5 Pos 5.08mm pitch T hrough Hole Header"
  round 2.1 hole 1.4: 1(-7.62,-3.048) 2(-2.54,-3.048) 3(2.54,-3.048) 4(7.62,-3.048)
  round 0 hole 2.4: FS1(-12.7,-5.548) FS2(12.7,-5.548)
  silkscreen extent -15.24,-13.05 15.24,-1.05, body extent -15.24,-13.05 15.24,-1.05, height 8.71
1776715 [mm] "Pluggable Terminal Blocks 4 Pos 5mm pitch Thro ugh Hole Header"
  round 2.1 hole 1.4: 1(-7.493,-3.048) 2(-2.493,-3.048) 3(2.507,-3.048) 4(7.507,-3.048)
  round 0 hole 2.4: MH1(-12.493,-5.548) MH2(12.507,-5.548)
  silkscreen extent -14.99,-13.05 15.01,-1.05, body extent -14.99,-13.05 15.01,-1.05, height 8.6
1776731 [mm] "TERM BLOCK HDR 6POS 90DEG 5MM"
  round 2.1 hole 1.4: 1(-12.5,-2) 2(-7.5,-2) 3(-2.5,-2) 4(2.5,-2) 5(7.5,-2) 6(12.5,-2)
  round 0 hole 2.4 unplated: MH1(-17.5,-4.5)
  round 0 hole 2.4: MH2(17.5,-4.5)
  Keep-Out Layer circle w0.254: c-17.5,-4.5 r2.032
  Keep-Out Layer circle w0.254: c17.5,-4.5 r2.032
  silkscreen extent -20,-12 20,0, body extent -20,-12 20,0, height 8.6
ATML-100A_M [mm] "TQFP, 100-Leads, Body 14x14mm, Pitch 0.5mm, IPC Low Density"
  oval 1.65x0.3 smd: 1(-7.825,6) 2(-7.825,5.5) 3(-7.825,5) 4(-7.825,4.5) 5(-7.825,4) 6(-7.825,3.5) 7(-7.825,3) 8(-7.825,2.5) 9(-7.825,2) 10(-7.825,1.5) 11(-7.825,1) 12(-7.825,0.5) 13(-7.825,0) 14(-7.825,-0.5) 15(-7.825,-1) 16(-7.825,-1.5) 17(-7.825,-2) 18(-7.825,-2.5) 19(-7.825,-3) 20(-7.825,-3.5) 21(-7.825,-4) 22(-7.825,-4.5) 23(-7.825,-5) 24(-7.825,-5.5) 25(-7.825,-6) 51(7.825,-6) 52(7.825,-5.5) 53(7.825,-5) 54(7.825,-4.5) 55(7.825,-4) 56(7.825,-3.5) 57(7.825,-3) 58(7.825,-2.5) 59(7.825,-2) 60(7.825,-1.5) 61(7.825,-1) 62(7.825,-0.5) 63(7.825,0) 64(7.825,0.5) 65(7.825,1) 66(7.825,1.5) 67(7.825,2) 68(7.825,2.5) 69(7.825,3) 70(7.825,3.5) 71(7.825,4) 72(7.825,4.5) 73(7.825,5) 74(7.825,5.5) 75(7.825,6)
  oval 0.3x1.65 smd: 26(-6,-7.825) 27(-5.5,-7.825) 28(-5,-7.825) 29(-4.5,-7.825) 30(-4,-7.825) 31(-3.5,-7.825) 32(-3,-7.825) 33(-2.5,-7.825) 34(-2,-7.825) 35(-1.5,-7.825) 36(-1,-7.825) 37(-0.5,-7.825) 38(0,-7.825) 39(0.5,-7.825) 40(1,-7.825) 41(1.5,-7.825) 42(2,-7.825) 43(2.5,-7.825) 44(3,-7.825) 45(3.5,-7.825) 46(4,-7.825) 47(4.5,-7.825) 48(5,-7.825) 49(5.5,-7.825) 50(6,-7.825) 76(6,7.825) 77(5.5,7.825) 78(5,7.825) 79(4.5,7.825) 80(4,7.825) 81(3.5,7.825) 82(3,7.825) 83(2.5,7.825) 84(2,7.825) 85(1.5,7.825) 86(1,7.825) 87(0.5,7.825) 88(0,7.825) 89(-0.5,7.825) 90(-1,7.825) 91(-1.5,7.825) 92(-2,7.825) 93(-2.5,7.825) 94(-3,7.825) 95(-3.5,7.825) 96(-4,7.825) 97(-4.5,7.825) 98(-5,7.825) 99(-5.5,7.825) 100(-6,7.825)
  silkscreen extent -7.95,-6.6 6.6,6.82, body extent -8,-8 8,8, height 1.2
BOUR-MF-MSMF050-2_V [mm] "SMD, 2-Leads, Body 4.55x3.24mm"
  rect 1.5x3.2 smd: 1(-2.1,0) 2(2.1,0)
  silkscreen extent -3.52,-1.62 0.95,1.62, body extent -2.27,-1.62 2.27,1.62, height 0.85
C500h220z368#1 [mm] "C500h220z368 hole"
  round 5 hole 2.2: 1(0.003,0.023)
C500h220z368#2 [mm] "C500h220z368 hole"
  round 5 hole 2.2: 1(0.032,0.021)
C500h220z368#3 [mm] "C500h220z368 hole"
  round 5 hole 2.2: 1(0.03,0.021)
C500h220z368#4 [mm] "C500h220z368 hole"
  round 5 hole 2.2: 1(-0.041,0.031)
CAPC1005X06M#1 [mm] "Chip Capacitor, 2-Leads, Body 1,00x0,50mm, IPC Low Density"
  rect 0.76x0.72 smd: 1(-0.49,0) 2(0.49,0)
  body extent -0.53,-0.28 0.53,0.28, height 0.55
CAPC1005X06M#2 [mm] "Chip Capacitor, 2-Leads, Body 1,00x0,50mm, IPC Low Density"
  rect 0.72x0.72 smd: 1(-0.51,0) 2(0.51,0)
  body extent -0.53,-0.28 0.53,0.28, height 0.55
CAPC1608X09M [mm] "Chip Capacitor, 2-Leads, Body 1,60x0,80mm, IPC Low Density"
  rect 1.3x1.05 smd: 1(-0.8,0) 2(0.8,0)
  body extent -0.85,-0.45 0.85,0.45, height 0.9
CAPC2012X14M [mm] "Chip Capacitor, 2-Leads, Body 2,00x1,25mm, IPC Low Density"
  rect 1.45x1.5 smd: 1(-0.925,0) 2(0.925,0)
  body extent -1.05,-0.67 1.05,0.67, height 1.35
CAPC3225X22M [mm] "Chip Capacitor, 2-Leads, Body 3,20x2,50mm, IPC Low Density"
  rect 1.6x2.8 smd: 1(-1.5,0) 2(1.5,0)
  silkscreen extent -0.3,-1.3 0.3,1.3, body extent -1.75,-1.35 1.75,1.35, height 2.2
CAPC3225X27M [mm] "Chip Capacitor, 2-Leads, Body 3,20x2,50mm, IPC Low Density"
  rect 1.75x2.8 smd: 1(-1.425,0) 2(1.425,0)
  silkscreen extent -0.15,-1.3 0.15,1.3, body extent -1.75,-1.35 1.75,1.35, height 2.7
DIOC1005X02R [mm] "Chip Diode, 2-Leads, Body 1,00x0,50mm, Manufacturer Recommended"
  rect 0.5x0.6 smd paste+0 mask+0: 1(-0.447,0) 2(0.453,0)
  silkscreen extent -0.98,0.42 -0.88,0.52, body extent -0.8,-0.43 0.8,0.43, height 0.25
DIOM6959X26M [mm] "Molded Diode, 2-Leads, Body 6,86x5,91mm, IPC Low Density"
  rect 2.85x3.25 smd: 1(-2.95,0) 2(2.95,0)
  silkscreen extent -4.37,-3.15 3.6,3.15, body extent -3.77,-3.11 3.77,3.11, height 2.62
DPAK229P900X140-3M [mm] "D-PAK, 3-Pads, Body 6,46x6,52mm (max), IPC Low Density"
  rect 2.8x1.05 smd: 1(-3.85,2.29) 2(-3.85,-2.29)
  rect 6.6x5.8 smd: 3(1.95,0)
  silkscreen extent -3.97,-3.15 -1.75,3.49, body extent -3.53,-3.15 5.47,3.15, height 1.4
DPAK254P1510X470-3M [mm] "D2-PAK, 3-Pads, Body 7,73x8,49mm (max), IPC Low Density"
  rect 4x1.5 smd: 1(-6.3,2.54) 3(-6.3,-2.54)
  rect 8.9x8.65 smd: 4(3.9,0)
  silkscreen extent -6.42,-5.15 -0.95,5.15, body extent -6.57,-5.13 8.53,5.13, height 4.7
FA-20H [mm] "SEIKO EPSON CRYSTAL"
  rect 1.2x1.1 smd paste+0 mask+0: 1(-0.85,-0.7) 2(0.85,-0.7) 3(0.85,0.7) 4(-0.85,0.7)
  silkscreen extent -2.15,-1.63 1.3,1.65, body extent -1.55,-1.35 1.55,1.35, height 0.25
FID1X2R [mm] "Fiducial - Round 1x2mm"
  round 1 smd paste-0.5 mask+0.5: 0(0,0)
  L1 keep-out circle w1: c0,0 r0.5
  L1 keep-out region: 0,0
INDC2012X10M [mm] "Chip Inductor, 2-Leads, Body 2,00x1,25mm, IPC Low Density"
  rect 1.33x1.57 smd: 1(-0.985,0) 2(0.985,0)
  body extent -1.1,-0.72 1.1,0.72, height 1.05
LSHM_150_06_0_L_DV_A_N_K_TR [mm] "LSHM_150_06_0_L_DV_A_N_K_TR Without Shield"
  rect 0.3x1.5 smd: 1(12.25,-1.85) 2(12.25,1.85) 3(11.75,-1.85) 4(11.75,1.85) 5(11.25,-1.85) 6(11.25,1.85) 7(10.75,-1.85) 8(10.75,1.85) 9(10.25,-1.85) 10(10.25,1.85) 11(9.75,-1.85) 12(9.75,1.85) 13(9.25,-1.85) 14(9.25,1.85) 15(8.75,-1.85) 16(8.75,1.85) 17(8.25,-1.85) 18(8.25,1.85) 19(7.75,-1.85) 20(7.75,1.85) 21(7.25,-1.85) 22(7.25,1.85) 23(6.75,-1.85) 24(6.75,1.85) 25(6.25,-1.85) 26(6.25,1.85) 27(5.75,-1.85) 28(5.75,1.85) 29(5.25,-1.85) 30(5.25,1.85) 31(4.75,-1.85) 32(4.75,1.85) 33(4.25,-1.85) 34(4.25,1.85) 35(3.75,-1.85) 36(3.75,1.85) 37(3.25,-1.85) 38(3.25,1.85) 39(2.75,-1.85) 40(2.75,1.85) 41(2.25,-1.85) 42(2.25,1.85) 43(1.75,-1.85) 44(1.75,1.85) 45(1.25,-1.85) 46(1.25,1.85) 47(0.75,-1.85) 48(0.75,1.85) 49(0.25,-1.85) 50(0.25,1.85) 51(-0.25,-1.85) 52(-0.25,1.85) 53(-0.75,-1.85) 54(-0.75,1.85) 55(-1.25,-1.85) 56(-1.25,1.85) 57(-1.75,-1.85) 58(-1.75,1.85) 59(-2.25,-1.85) 60(-2.25,1.85) 61(-2.75,-1.85) 62(-2.75,1.85) 63(-3.25,-1.85) 64(-3.25,1.85) 65(-3.75,-1.85) 66(-3.75,1.85) 67(-4.25,-1.85) 68(-4.25,1.85) 69(-4.75,-1.85) 70(-4.75,1.85) 71(-5.25,-1.85) 72(-5.25,1.85) 73(-5.75,-1.85) 74(-5.75,1.85) 75(-6.25,-1.85) 76(-6.25,1.85) 77(-6.75,-1.85) 78(-6.75,1.85) 79(-7.25,-1.85) 80(-7.25,1.85) 81(-7.75,-1.85) 82(-7.75,1.85) 83(-8.25,-1.85) 84(-8.25,1.85) 85(-8.75,-1.85) 86(-8.75,1.85) 87(-9.25,-1.85) 88(-9.25,1.85) 89(-9.75,-1.85) 90(-9.75,1.85) 91(-10.25,-1.85) 92(-10.25,1.85) 93(-10.75,-1.85) 94(-10.75,1.85) 95(-11.25,-1.85) 96(-11.25,1.85) 97(-11.75,-1.85) 98(-11.75,1.85) 99(-12.25,-1.85) 100(-12.25,1.85)
  round 1.45 hole 1.45 unplated: ""(-13.5,-0.85) ""(13.5,-0.85)
  silkscreen extent -15.35,-3 15.35,3, body extent -14.88,-2.46 14.92,2.52, height 7.3
RESC1005X04M [mm] "Chip Resistor, 2-Leads, Body 1,00x0,50mm, IPC Low Density"
  rect 0.7x0.65 smd: 1(-0.475,0) 2(0.475,0)
  body extent -0.53,-0.28 0.53,0.28, height 0.37
RESC1608X06M#1 [mm] "Chip Resistor, 2-Leads, Body 1,60x0,80mm, IPC Low Density"
  rect 1x1 smd: 1(-0.9,0) 2(0.9,0)
  silkscreen extent -0.1,-0.4 0.1,0.4, body extent -0.85,-0.45 0.85,0.45, height 0.55
RESC1608X06M#2 [mm] "Chip Resistor, 2-Leads, Body 1,60x0,80mm, IPC Low Density"
  rect 1.15x1.1 smd: 1(-0.825,0) 2(0.825,0)
  body extent -0.85,-0.5 0.85,0.5, height 0.56
RESC3226X12M [mm] "Chip Resistor, 2-Leads, Body 3,22x2,58mm, IPC Low Density"
  rect 1.8x2.9 smd: 1(-1.4,0) 2(1.4,0)
  silkscreen extent -0.1,-1.35 0.1,1.35, body extent -1.63,-1.4 1.72,1.34, height 0.88
RESC7451X09M [mm] "Chip Resistor, 2-Leads, Body 7,36x5,12mm, IPC Low Density"
  rect 2.4x5.55 smd: 1(-3.35,0) 2(3.35,0)
  silkscreen extent -1.75,-2.67 1.75,2.68, body extent -3.71,-2.59 3.64,2.55, height 0.91
"SIP564W40P254L1980H810Q6 - Cloned" [mil] "SIP, 2.54 mm pitch; 7 pin, 19.80 mm L X 5.64 mm W X 8.10 mm H body"
  rect 45.28x45.28 / inner round 41.83 / far side rect 45.28x45.28 hole 29.53: 1(-300,0)
  round 45.28 hole 29.53: 2(-100,0) 3(100,0) 4(300,0) 5(-200,0) 6(200,0)
  body extent -374,-99 374,99, height 300
SMA-J-P-H-RA-TH1 [mm] "Conn SMA RCP 0Hz to 18GHz 50Ohm Solder RA Thru-Hole Gold"
  round 2.4 hole 1.6: 1(0,0) 2(2.54,-2.54) 3(2.54,2.54) 4(-2.54,2.54) 5(-2.54,-2.54)
  silkscreen extent -3.5,-3.5 3.5,3.5, body extent -11.6,-3.5 3.5,3.5, height 9.85
SOIC127P600X175-8M [mm] "SOIC, 8-Leads, Body 4,90x3,90mm, Pitch 1,27mm, IPC Low Density"
  oval 1.65x0.65 smd: 1(-2.825,1.905) 2(-2.825,0.635) 3(-2.825,-0.635) 4(-2.825,-1.905) 5(2.825,-1.905) 6(2.825,-0.635) 7(2.825,0.635) 8(2.825,1.905)
  silkscreen extent -2.95,-2.5 1.6,2.9, body extent -3,-2.5 3,2.5, height 1.75
SOT95P237X111-3M [mm] "SOT23, 3-Leads, Body 2,92x2,37mm, Pitch 0,95mm, IPC Low Density"
  rect 1.2x0.65 smd: 1(-1.3,0.95) 2(-1.3,-0.95) 3(1.3,0)
  silkscreen extent -1.42,-1.5 0.7,1.95, body extent -1.32,-1.52 1.32,1.52, height 1.11
SOT230P700X180-4M [mm] "SOT223, 4-Leads, Body 6,50x7,00mm (avg), Pitch 2,30mm, IPC Low Density"
  rect 2.35x1 smd: 1(-3.025,2.3) 2(-3.025,0) 3(-3.025,-2.3)
  rect 2.35x3.3 smd: 4(3.025,0)
  silkscreen extent -3.15,-3.35 1.55,3.47, body extent -3.5,-3.35 3.5,3.35, height 1.8
TQFP80P1200X1200X120-44M [mm] "TQFP, 44-Leads, Body 10,00x10,00mm, Pitch 0,80mm, IPC Low Density"
  oval 1.7x0.6 smd: 1(-5.85,4) 2(-5.85,3.2) 3(-5.85,2.4) 4(-5.85,1.6) 5(-5.85,0.8) 6(-5.85,0) 7(-5.85,-0.8) 8(-5.85,-1.6) 9(-5.85,-2.4) 10(-5.85,-3.2) 11(-5.85,-4) 23(5.85,-4) 24(5.85,-3.2) 25(5.85,-2.4) 26(5.85,-1.6) 27(5.85,-0.8) 28(5.85,0) 29(5.85,0.8) 30(5.85,1.6) 31(5.85,2.4) 32(5.85,3.2) 33(5.85,4)
  oval 0.6x1.7 smd: 12(-4,-5.85) 13(-3.2,-5.85) 14(-2.4,-5.85) 15(-1.6,-5.85) 16(-0.8,-5.85) 17(0,-5.85) 18(0.8,-5.85) 19(1.6,-5.85) 20(2.4,-5.85) 21(3.2,-5.85) 22(4,-5.85) 34(4,5.85) 35(3.2,5.85) 36(2.4,5.85) 37(1.6,5.85) 38(0.8,5.85) 39(0,5.85) 40(-0.8,5.85) 41(-1.6,5.85) 42(-2.4,5.85) 43(-3.2,5.85) 44(-4,5.85)
  silkscreen extent -5.97,-4.6 4.6,4.97, body extent -6,-6 6,6, height 1.2
TSOP65P640X120-16M [mm] "TSOP, 16-Leads, Body 5,00x4,40mm, Pitch 0,65mm, IPC Low Density"
  oval 1.6x0.45 smd: 1(-3.05,2.275) 2(-3.05,1.625) 3(-3.05,0.975) 4(-3.05,0.325) 5(-3.05,-0.325) 6(-3.05,-0.975) 7(-3.05,-1.625) 8(-3.05,-2.275) 9(3.05,-2.275) 10(3.05,-1.625) 11(3.05,-0.975) 12(3.05,-0.325) 13(3.05,0.325) 14(3.05,0.975) 15(3.05,1.625) 16(3.05,2.275)
  silkscreen extent -3.18,-2.55 1.85,3.17, body extent -3.2,-2.55 3.2,2.55, height 1.2
TSOP65P640X120_HS-21M [mm] "TSOP, 20-Leads, Body 6,50x4,40mm, Pitch 0,65mm, Thermal Pad 3,75x2,45mm, IPC Low Density"
  oval 1.6x0.45 smd: 1(-3.05,2.925) 2(-3.05,2.275) 3(-3.05,1.625) 4(-3.05,0.975) 5(-3.05,0.325) 6(-3.05,-0.325) 7(-3.05,-0.975) 8(-3.05,-1.625) 9(-3.05,-2.275) 10(-3.05,-2.925) 11(3.05,-2.925) 12(3.05,-2.275) 13(3.05,-1.625) 14(3.05,-0.975) 15(3.05,-0.325) 16(3.05,0.325) 17(3.05,0.975) 18(3.05,1.625) 19(3.05,2.275) 20(3.05,2.925)
  rect 2.45x3.75 smd: 21(0,0)
  silkscreen extent -3.17,-3.3 1.85,3.82, body extent -3.2,-3.3 3.2,3.3, height 1.2
TSSOP0P360X135-2M [mm] "TSSOP, 2-Leads, Body 1,60x2,69mm, Pitch 0,00mm, IPC Low Density"
  oval 1.05x0.75 smd: 1(-1.925,0) 2(1.925,0)
  silkscreen extent -1,-1.01 2.03,0.9, body extent -1.79,-0.9 1.79,0.9, height 1.35
TSW-103-08-F-D-RA [mil] "6 Pin Header Vertical, right-angle"
  round 63.78 hole 30: 1(-100,110) 2(-100,210) 3(0,110) 4(0,210) 5(100,110) 6(100,210)
  silkscreen extent -168,-298 168,260, body extent -150,-281 150,221, height 218
TSW-106-08-F-S-RA [mil] "6 Pin Header, right-angle, 1 row"
  round 63.78 hole 30: 1(-250,-110) 2(-150,-110) 3(-50,-110) 4(50,-110) 5(150,-110) 6(250,-110)
  silkscreen extent -318,-160 318,298, body extent -300,-122 300,280, height 121

## Part data
C1 C2 C3 C4 C5 C6 C7 C8 C9 C10 C11 C12 C13 C14 C16 C17 C20: library part C01-0402-01-00001-1, "Cap Ceramic 100nF 50V X7R 5% SMD 0402 125°C", Capacitor Type=Ceramic, Case/Package=0402, Dielectric=X7R, Manufacturer=YAGEO, Max Operating Temperature=125°C, Min Operating Temperature=-55°C, Tolerance=5%, Voltage Rating=16V, Composition=Ceramic, Depth=500µm, Length=1mm, Manufacturer P/N=CC0402JRX7R7BB104, Mount="Surface Mount", Mounting Technology="Surface Mount", Pins=2, RoHS Compliant=Yes, Termination=SMD/SMT, Thickness=558.8µm, Voltage Rating (DC)=16V, Width=508µm
C15: library part C01-0402-01-00004-1, "Cap Ceramic 1uF 16V XR7 5% SMD 0603 125°C", Capacitor Type=Ceramic, Case/Package=0603, Dielectric=XR7, Manufacturer=YAGEO, Max Operating Temperature=125°C, Min Operating Temperature=-55°C, Tolerance=5%, Voltage Rating=16V, Composition=Ceramic, Depth=800µm, Length=1.6mm, Manufacturer P/N=CC0603JRX7R7BB105, Mount="Surface Mount", Mounting Technology="Surface Mount", Pins=2, RoHS Compliant=Yes, Termination=SMD/SMT, Thickness=800µm, Voltage Rating (DC)=16V, Width=810µm
C18 C19 C22 C23: library part C01-0402-01-00008-1, "Cap Ceramic 20pF 50V C0G 5% SMD 0402 125°C", Capacitor Type=Ceramic, Case/Package=0402, Dielectric=COG, Manufacturer=YAGEO, Max Operating Temperature=125°C, Min Operating Temperature=-55°C, Tolerance=5%, Voltage Rating=50V, Composition=Ceramic, Depth=500µm, Length=990.6µm, Manufacturer P/N=CC0402JRNPO9BN200, Mount="Surface Mount", Mounting Technology="Surface Mount", Pins=2, RoHS Compliant=Yes, Termination=SMD/SMT, Thickness=558.8µm, Voltage Rating (DC)=50V, Width=508µm
C21: library part C01-0402-01-00002-1, "Multilayer Ceramic Capacitors (High dielectric type), 16V, 100 uF, ± 20 %, 1210, X5R, RoHS", Capacitor Type="Multilayer Ceramic", Case/Package=1210, Dielectric=XR5, Manufacturer="Taiyo Yuden", Max Operating Temperature=85°C, Min Operating Temperature=-55°C, Tolerance=20%, Voltage Rating=16V, Composition=Ceramic, Depth=2.2m, Length=3.5m, Manufacturer P/N=EMK325ABJ107MM-P, Mount=SMD, Mounting Technology=SMD, Pins=2, RoHS Compliant=Yes, Termination=-, Thickness=2.2m, Voltage Rating (DC)=16V, Width=2.8m
C24: library part C01-0402-01-00005-1, "1210 100 V 1 uF X7R ±10% Tolerance Multilayer Ceramic Chip Capacitor", Capacitor Type="Multilayer Ceramic", Case/Package=1210, Dielectric=X7R, Manufacturer=YAGEO, Max Operating Temperature=125°C, Min Operating Temperature=-55°C, Tolerance=10%, Voltage Rating=100V, Composition=Ceramic, Depth=2.5mm, Length=3.2004mm, Manufacturer P/N=CC1210KKX7R0BB105, Mount="Surface Mount", Mounting Technology=SMD, Pins=2, RoHS Compliant=Yes, Termination=-, Thickness=2.2098mm, Voltage Rating (DC)=100V, Width=2.4892mm
C25: library part C01-0402-01-00003-1, "Cap Ceramic 27nF 50V X7R 5% SMD 0805 125°C", Capacitor Type=Ceramic, Case/Package=0805, Dielectric=XR7, Manufacturer=YAGEO, Max Operating Temperature=125°C, Min Operating Temperature=-55°C, Tolerance=5%, Voltage Rating=50V, Composition=Ceramic, Depth=1.25mm, Length=2mm, Manufacturer P/N=CC0805JRX7R9BB273, Mount="Surface Mount", Mounting Technology="Surface Mount", Pins=2, RoHS Compliant=Yes, Termination=SMD/SMT, Thickness=711.2µm, Voltage Rating (DC)=50V, Width=1.2466mm
D1: library part CMP-004-00031-2, "DIODE SCHOTTKY 30V 1A SOD123 / Rectifier Diode Schottky 30V 1A 2-Pin SOD-123", Case/Package=SOD-123-2, Forward Current=1A, Forward Voltage=470mV, Manufacturer="ON Semiconductor", Max Operating Temperature=125°C, Max Surge Current=5.5A, Min Operating Temperature=-65°C, Peak Inverse Voltage=30V, Manufacturer P/N=MBR130T1G, Mounting Technology=SMD, Pins=2, RoHS Compliant=yes
D2 D4 D6: library part CMP-004-00033-1, "Schottky Rectifier, 100V, 20A, TO-252AE Rohs Compliant: Yes", Case/Package="SlimDPAK (TO-252AE)", Forward Current=20A, Forward Voltage=600mV, Manufacturer=Vishay, Max Operating Temperature=150°C, Max Surge Current=200A, Min Operating Temperature=-40°C, Peak Inverse Voltage=100V, Manufacturer P/N=V20PW10-M3/I, Mounting Technology=SMD, Pins=3, RoHS Compliant=Yes
D3 D5 D9: library part CMP-004-00032-1, "Diode Tvs Vwm 36V 1.5Kw Bidir Smc Rohs Compliant", Case/Package=SMD, Forward Current=200A, Forward Voltage=40V, Manufacturer=Bourns, Max Operating Temperature=150°C, Min Operating Temperature=-55°C, Manufacturer P/N=SMCJ36CA, Max Surge Current=200A, Mounting Technology=SMD, Peak Inverse Voltage=40V, Pins=2, RoHS Compliant=Yes
D7 D10 D12: library part D01-0402-01-00001-1, "Led red 0402", Case/Package=0402, Colour=red, Forward Current="20 mA", Forward Voltage=2V, Manufacturer=ROHM, Max Operating Temperature=85°C, Max Power Dissipation=52mW, Min Operating Temperature=-40°C, Dominant Wavelength="620 nm", Lens Style="Rectangular, Square", Luminous Intensity="85 mcd", Manufacturer P/N=SML-P12UTT86R, Mounting Technology=SMD, Number of LEDs=1, Pins=2, RoHS Compliant=Yes
D8: library part CMP-004-00035-1, "Diode Tvs Vwm 7V 1.5Kw Bidir Smc Rohs Compliant", Case/Package=SMD, Forward Current=125A, Forward Voltage=7.78V, Manufacturer=Bourns, Max Operating Temperature=150°C, Min Operating Temperature=-55°C, Manufacturer P/N=SMCJ7.0CA, Max Surge Current=125A, Mounting Technology=SMD, Peak Inverse Voltage=7.78V, Pins=2, RoHS Compliant=Yes
D11 D13 D14 D15 D16 D17 D18 D19 D20 D21 D22 D23 D24 D25 D26 D27 D28 D29 D30 D31 D32 D33 D34 D35 D36: library part D01-0402-01-00000-1, "Led green 0402", Case/Package=0402, Colour=Green, Forward Current="20 mA", Forward Voltage=2.1V, Manufacturer=ROHM, Max Operating Temperature=85°C, Max Power Dissipation=52mW, Min Operating Temperature=-40°C, Dominant Wavelength="560 nm", Lens Style="Rectangular, Square", Luminous Intensity="10 mcd", Manufacturer P/N=SML-P13PTT86R, Mounting Technology=SMD, Number of LEDs=1, Pins=2, RoHS Compliant=Yes
F1: library part CMP-005-00013-1, "PTC Resettable Fuse 0.5A(hold) 1A(trip) 15V 100A 0.8W 0.15s 0.15Ohm SMD Solder Pad 1812", Case/Package=1812, Current Rating=1A, Manufacturer=Bourns, Max Operating Temperature=85°C, Min Operating Temperature=-40°C, Voltage=15V, Manufacturer P/N=MF-MSMF050-2, Mounting Technology=SMD, Pins=2, RoHS Compliant=Yes
F2 F3: library part CMP-005-00014-1, "PTC Resettable Fuse 1.1A(hold) 2.2A(trip) 33VDC 100A 1.5W 0.5s 0.09Ohm SMD Solder Pad 2920 T/R Automotive", Case/Package=2920, Current Rating=1.1A, Manufacturer=BelFuse, Max Operating Temperature=85°C, Min Operating Temperature=-40°C, Voltage=33V, Manufacturer P/N=0ZCF0110FF2C, Mounting Technology=SMD, Pins=2, RoHS Compliant=Yes
F4: library part CMP-005-00015-1, "Low Ohmic PTC Resettable Fuse 5.5A 12V 1210 T/R", Case/Package=1210, Current Rating=5.5A, Manufacturer=Bourns, Max Operating Temperature=85°C, Min Operating Temperature=-40°C, Voltage=12V, Manufacturer P/N=MF-USML550/12-2, Mounting Technology=SMD, Pins=2, RoHS Compliant=Yes
FD1 FD2 FD3: library part CMP-00028-00005-2, "Fiducial - Round 1x2mm", Pins=0
J1 J2: library part J01-001-01-00001-2, "Conn Socket and Terminal Strip HDR/SKT 100 POS 0.5mm Solder ST SMD T/R", Case/Package=SMD, Housing Color=Black, Manufacturer=Samtec, Max Operating Temperature=125°C, Min Operating Temperature=-55°C, Contact Material=Bronze, Contact Plating=Gold, Depth="4.98 mm", Gender=HERMAPHRODITIC, Housing Material=Polymer, Length="29.7 mm", Manufacturer P/N=LSHM-150-06.0-L-DV-A-N-K-TR, Mounting Technology=SMD, Number of Rows=2, Orientation=Straight, Pins=100, Pitch="500 µm", RoHS Compliant=Yes, Termination=Solder
J3: library part J01-001-01-00006-1, "Pluggable Terminal Blocks 6 Pos 5mm pitch Thro ugh Hole Header", Case/Package=TH, Housing Color=Green, Manufacturer="Phoenix Contact", Max Operating Temperature=125°C, Min Operating Temperature=-55°C, Contact Material=-, Contact Plating=Tin, Depth=12, Gender=Male, Housing Material=Polybutylene, Length=40, Manufacturer P/N=1776731, Mounting Technology=TH, Number of Rows=1, Orientation="Right Angle", Pins=6, Pitch="5 mm", RoHS Compliant=Yes, Termination=Tin
J4 J11: library part J01-001-01-00003-2, "6 Vias Pin Header 2.54mm, Right Angle", Case/Package="Through Hole", Housing Color=Black, Manufacturer=Samtec, Max Operating Temperature=125°C, Min Operating Temperature=-55°C, Contact Material=Bronze, Contact Plating=Gold, Depth="4.87 mm", Gender=Male, Housing Material=Polyester, Length="7.62 mm", Manufacturer P/N=TSW-103-08-F-D-RA, Mounting Technology="Through Hole", Number of Rows=2, Orientation=Straight, Pins=6, Pitch=2.54mm, RoHS Compliant=Yes, Termination=Solder
J5: library part J01-001-01-00007-2, "Pluggable Terminal Blocks 4 Pos 5mm pitch Thro ugh Hole Header", Case/Package=TH, Housing Color=Green, Manufacturer="Phoenix Contact", Max Operating Temperature=125°C, Min Operating Temperature=-55°C, Contact Material=-, Contact Plating=Tin, Depth=12, Gender=Male, Housing Material=Polybutylene, Length=30, Manufacturer P/N=1776715, Mounting Technology=TH, Number of Rows=1, Orientation="Right Angle", Pins=4, Pitch=5, RoHS Compliant=Yes, Termination=Solder
J6 J12: library part J01-001-01-00005-2, "6 Vias Pin Header 2.54mm, Right Angle, 1 Row", Case/Package="Through Hole", Housing Color=Black, Manufacturer=Samtec, Max Operating Temperature=125°C, Min Operating Temperature=-55°C, Contact Material=Bronze, Contact Plating=Gold, Depth="4.87 mm", Gender=Male, Housing Material=Polyester, Length="7.62 mm", Manufacturer P/N=HTSW-106-08-F-S-RA, Mounting Technology="Through Hole", Number of Rows=2, Orientation=Straight, Pins=6, Pitch=2.54mm, RoHS Compliant=Yes, Termination=Solder
J7: library part J01-001-01-00008-1, "Pluggable Terminal Blocks 4 Pos 5.08mm pitch T hrough Hole Header", Case/Package=TH, Housing Color=Green, Manufacturer="Phoenix Contact", Max Operating Temperature=155°C, Min Operating Temperature=-55°C, Contact Material=-, Contact Plating=Tin, Depth=12, Gender=Male, Housing Material=Polybutylene, Length=30.48mm, Manufacturer P/N=1776524, Mounting Technology=TH, Number of Rows=1, Orientation="Right Angle", Pins=4, Pitch=5.08mm, RoHS Compliant=Yes, Termination=Solder
J8: library part J01-001-01-00004-1, "Conn USB 2.0 Type B RCP 4 POS 2.5mm Solder RA Thru-Hole 4 Terminal 1 Port Box/Tray", Case/Package=TH, Housing Color=Black, Manufacturer="TE Conectivity", Manufacturer P/N=292304-1, Max Operating Temperature=125°C, Min Operating Temperature=55°C, Contact Material=Copper, Contact Plating=Gold, Depth=-, Gender=Receptacle, Housing Material=Thermoplastic, Length="15.71 mm", Mounting Technology=TH, Number of Rows=2, Orientation="Right Angle", Pins=4, Pitch=-, RoHS Compliant=Yes, Termination=-
J9 J10: library part J01-001-01-00009-2, "Conn SMA RCP 0Hz to 18GHz 50Ohm Solder RA Thru-Hole Gold", Case/Package=TH, Housing Color=Gold, Manufacturer=Samtec, Max Operating Temperature=125°C, Min Operating Temperature=-65°C, Contact Material="Copper, Gold", Contact Plating=Gold, Depth=7mm, Gender=Female, Housing Material="Copper, Gold", Length=15.1mm, Manufacturer P/N=SMA-J-P-H-RA-TH1, Mounting Technology=TH, Number of Rows=1, Orientation="Right angle", Pins=5, Pitch=0, RoHS Compliant=Yes, Termination=solder
K1 K16: library part K01-0008-01-00002-6, "Reed Relay 5VDC 350Ohm 0.5A SPST-NO THT", Case/Package=SIP, Coil Current=14.28mA, Coil Voltage (DC)=5V, Contact Current Rating=500mA, Contact Resistence=0.2, Insulation Resistance=1T, Manufacturer=COTO, Max Operating Temperature=85°C, Min Operating Temperature=-20°C, Switching Voltage=200V, Coil resitence=350, Coil Type=Non-Latching, Contact Form=SPST, Contact Material=Ruthenium, Height=7.6mm, Manufacturer P/N=9002-05-00, Mounting Technology="Through Hole", Number of Terminal=6, Operate Time=350µs, Packaging=Bulk, Pins=6, Relay Type=RF, Release Time=100µs, Rise time=350µs, RoHS=Yes, Switching Current=500mA, Width=19.3mm
K2 K3 K4 K5 K6 K7 K8 K9 K10 K11 K12 K13 K14 K15 K17 K18 K19 K20 K21: library part K01-0008-01-00008-1, "Reed Relay, Mini SIP, 5 VDC; 1 Form A, 15W, 200 VDC, 1.25A", Case/Package=SIP, Coil Current=10mA, Coil Voltage (DC)=5V, Contact Current Rating=1A, Contact Resistence=0.15, Insulation Resistance=0, Manufacturer=Comus, Max Operating Temperature=85°C, Min Operating Temperature=-40°C, Switching Voltage=200V, Coil resitence=500, Coil Type=-, Contact Form=1A, Contact Material=-, Height=6.98mm, Manufacturer P/N=3570.1419.051, Mounting Technology=TH, Number of Terminal=4, Operate Time=350µs, Packaging=SIP, Pins=4, Relay Type=Reed, Release Time=100µs, Rise time=0s, RoHS=Yes, Switching Current=1A, Width=15.24mm
L1 L2: library part R01-0805-01-00691-1, "Ferrite Beads Multi-Layer High Current 1KOhm 25% 100MHz 1.6A 0.12Ohm DCR 0805", Case/Package=0805, Current Rating=1.6A, DC Resistance (DCR)=0.4, Frequency=100MHz, Manufacturer="Murata Electronics", Max Operating Temperature=-55°C, Min Operating Temperature=125°C, Contact Plating=Tin, Core Material=Ferrite, Depth=1.25mm, Height=1.05mm, Impedance=1k, Length=2mm, Manufacturer P/N=BLM21SP102SN1D, Material=Ferrite, Number of Pins=2, RoHS=Yes, Width=1.25mm
MH1 MH2 MH3 MH4: library part CMP-00028-00007-2, "hole 5mm pad drill 2.2", Case/Package=Pad, Manufacturer=Ionosens, Manufacturer P/N=H5D22, Max Operating Temperature=-40°C, Min Operating Temperature=125°C, Mounting Technology=Pad, Pins=1, RoHS Compliant=yes
Q1: library part CMP-013-00034-1, "100-V, N channel NexFET™ power MOSFET, single D2PAK, 3.4 mOhm 3-DDPAK/TO-263 -55 to 175", Case/Package=DDPAK, Manufacturer="Texas Instrument", Max Operating Temperature=175°C, Min Operating Temperature=-55°C, Power=300W, Manufacturer P/N=CSD19535KTT, Mounting Technology=SMD, Pins=3, RoHS Compliant=Yes, Transistor Type=MOSFET, Vgs (Max)=20V, Vgs(th) (Max) @ Id=20V
Q2: library part CMP-013-00035-1, "Transistor MOSFET P-Channel 30V 7.5A 3W (Ta) Surface Mount SOT-223-4", Case/Package=SOT-223, Manufacturer="ON Semiconductor", Max Operating Temperature=150°C, Min Operating Temperature=-65°C, Power=3W, Manufacturer P/N=NDT456P, Mounting Technology=SMD, Pins=4, RoHS Compliant=Yes, Transistor Type="MOSFET P-Channel", Vgs (Max)=20V, Vgs(th) (Max) @ Id=1.5V
Q3: library part CMP-013-00021-4, "N-Channel Logic Level Enhancement Mode Field Effect Transistor, 220 mA, 50 V, -55 to 150 degC, 3-Pin SOT-23, RoHS, Tape and Reel", Case/Package=TO-236-3, Input Capacitance=27pF, Manufacturer=Fairchild, Max Operating Temperature=150°C, Min Operating Temperature=-55°C, Nominal Dual Supply Voltage=50V, Package Description="3-Pin Small Outline Transistor, Body 2.92 x 1.325 mm, Pitch 0.95 mm", Package Quantity=1, Package Reference=SOT23-3, Package Version="Rev. 12, 03/2016", Power=360mW, Resistance=0.7Ohm, Elements=1, Manufacturer P/N=BSS138, Mounting Technology=SM, Nominal Vgs=1.3V, Packaging=TapeandReel, Pins=3, Rds On Max=3.5Ohm, RoHS Compliant=True, Typical Rise Time=9ns
R1 R5 R7 R9: library part R01-0402-01-00169-2, "RES SMD 10K OHM 1% 1/16W 0402", Case/Package=0402, Manufacturer=Yageo, Max Operating Temperature=155°C, Min Operating Temperature=-55°C, Power Rating=62.5mW, Temperature Coefficient="100 ppm/ºC", Tolerance=1%, Voltage Rating=50V, Composition="Thick Film", Features="Automotive AEC-Q200, Moisture Resistant", Height=370µm, Length=990.6µm, Manufacturer P/N=AC0402FR-0710KL, Number of Terminations=2, Packaging="Tape & Reel", RoHS=Yes, Width=508µm
R2 R3: library part R01-0402-01-00227-3, "RES SMD 22 OHM 1% 1/16W 0402", Case/Package=0402, Manufacturer=Yageo, Max Operating Temperature=155°C, Min Operating Temperature=-55°C, Power Rating=62.5mW, Temperature Coefficient="100 ppm/ºC", Tolerance=1%, Voltage Rating=50V, Composition="Thick Film", Features="Automotive AEC-Q200, Moisture Resistant", Height=370µm, Length=990.6µm, Manufacturer P/N=AC0402FR-0722RL, Number of Terminations=2, Packaging="Tape & Reel", RoHS=Yes, Width=508µm
R4 R6: library part R01-0402-01-00105-2, "RES SMD 4.7K OHM 1% 1/16W 0402", Case/Package=0402, Manufacturer=Yageo, Max Operating Temperature=155°C, Min Operating Temperature=-55°C, Power Rating=62.5mW, Temperature Coefficient="100 ppm/ºC", Tolerance=1%, Voltage Rating=50V, Composition="Thick Film", Features="Automotive AEC-Q200, Moisture Resistant", Height=370µm, Length=990.6µm, Manufacturer P/N=AC0402FR-074K7L, Number of Terminations=2, Packaging="Tape & Reel", RoHS=Yes, Width=508µm
R8: library part R01-0402-01-00510-2, "RES SMD 499K OHM 1% 1/16W 0402", Case/Package=0402, Manufacturer=Yageo, Max Operating Temperature=155°C, Min Operating Temperature=-55°C, Power Rating=62.5mW, Temperature Coefficient="100 ppm/ºC", Tolerance=1%, Voltage Rating=50V, Composition="Thick Film", Features="Automotive AEC-Q200, Moisture Resistant", Height=370µm, Length=990.6µm, Manufacturer P/N=AC0402FR-07499KL, Number of Terminations=2, Packaging="Tape & Reel", RoHS=Yes, Width=508µm
R10: library part R01-0402-01-00418-2, "RES SMD 196K OHM 1% 1/16W 0402", Case/Package=0402, Manufacturer=Yageo, Max Operating Temperature=155°C, Min Operating Temperature=-55°C, Power Rating=62.5mW, Temperature Coefficient="100 ppm/ºC", Tolerance=1%, Voltage Rating=50V, Composition="Thick Film", Features="Automotive AEC-Q200, Moisture Resistant", Height=370µm, Length=990.6µm, Manufacturer P/N=AC0402FR-07196KL, Number of Terminations=2, Packaging="Tape & Reel", RoHS=Yes, Width=508µm
R11 R13 R16 R20 R21 R22 R23 R24 R25 R26 R27 R28 R29 R30 R31 R32 R33 R34 R35 R36 R37 R38 R39 R40 R41 R42 R43 R44: library part R01-0402-01-00437-2, "RES SMD 240 OHM 1% 1/16W 0402", Case/Package=0402, Manufacturer=Yageo, Max Operating Temperature=155°C, Min Operating Temperature=-55°C, Power Rating=62.5mW, Temperature Coefficient="100 ppm/ºC", Tolerance=1%, Voltage Rating=50V, Composition="Thick Film", Features="Automotive AEC-Q200, Moisture Resistant", Height=370µm, Length=990.6µm, Manufacturer P/N=AC0402FR-07240RL, Number of Terminations=2, Packaging="Tape & Reel", RoHS=Yes, Width=508µm
R12: library part R01-0402-01-00196-4, "RES SMD 16.2K OHM 1% 1/16W 0402", Case/Package=0402, Manufacturer=Yageo, Max Operating Temperature=155°C, Min Operating Temperature=-55°C, Power Rating=62.5mW, Temperature Coefficient="100 ppm/ºC", Tolerance=1%, Voltage Rating=50V, Composition="Thick Film", Features="Automotive AEC-Q200, Moisture Resistant", Height=370µm, Length=990.6µm, Manufacturer P/N=AC0402FR-0716K2L, Number of Terminations=2, Packaging="Tape & Reel", RoHS=Yes, Width=508µm
R14: library part R01-0402-01-00066-2, "RES SMD 2.94K OHM 1% 1/16W 0402", Case/Package=0402, Manufacturer=Yageo, Max Operating Temperature=155°C, Min Operating Temperature=-55°C, Power Rating=62.5mW, Temperature Coefficient="100 ppm/ºC", Tolerance=1%, Voltage Rating=50V, Composition="Thick Film", Features="Automotive AEC-Q200, Moisture Resistant", Height=370µm, Length=990.6µm, Manufacturer P/N=AC0402FR-072K94L, Number of Terminations=2, Packaging="Tape & Reel", RoHS=Yes, Width=508µm
R15: library part R01-0402-01-00471-2, "RES SMD 332K OHM 1% 1/16W 0402", Case/Package=0402, Manufacturer=Yageo, Max Operating Temperature=155°C, Min Operating Temperature=-55°C, Power Rating=62.5mW, Temperature Coefficient="100 ppm/ºC", Tolerance=1%, Voltage Rating=50V, Composition="Thick Film", Features="Automotive AEC-Q200, Moisture Resistant", Height=370µm, Length=990.6µm, Manufacturer P/N=AC0402FR-07332KL, Number of Terminations=2, Packaging="Tape & Reel", RoHS=Yes, Width=508µm
R17: library part R01-0402-01-00223-2, "RES SMD 22.6K OHM 1% 1/16W 0402", Case/Package=0402, Manufacturer=Yageo, Max Operating Temperature=155°C, Min Operating Temperature=-55°C, Power Rating=62.5mW, Temperature Coefficient="100 ppm/ºC", Tolerance=1%, Voltage Rating=50V, Composition="Thick Film", Features="Automotive AEC-Q200, Moisture Resistant", Height=370µm, Length=990.6µm, Manufacturer P/N=AC0402FR-0722K6L, Number of Terminations=2, Packaging="Tape & Reel", RoHS=Yes, Width=508µm